# Altium PCB Fastino_Ground_Isolator.PcbDoc (part 1 of 4)
Units mm, origin at the board's own origin, x right, y up, seen from the top; angles counter-clockwise.
Board outline 40 x 100 mm, 4 copper layers (Top Layer, Layer 1, Layer 2, Bottom Layer), stack 1.551 mm thick; 157 components, 67 nets, 468 pads, 321 vias.
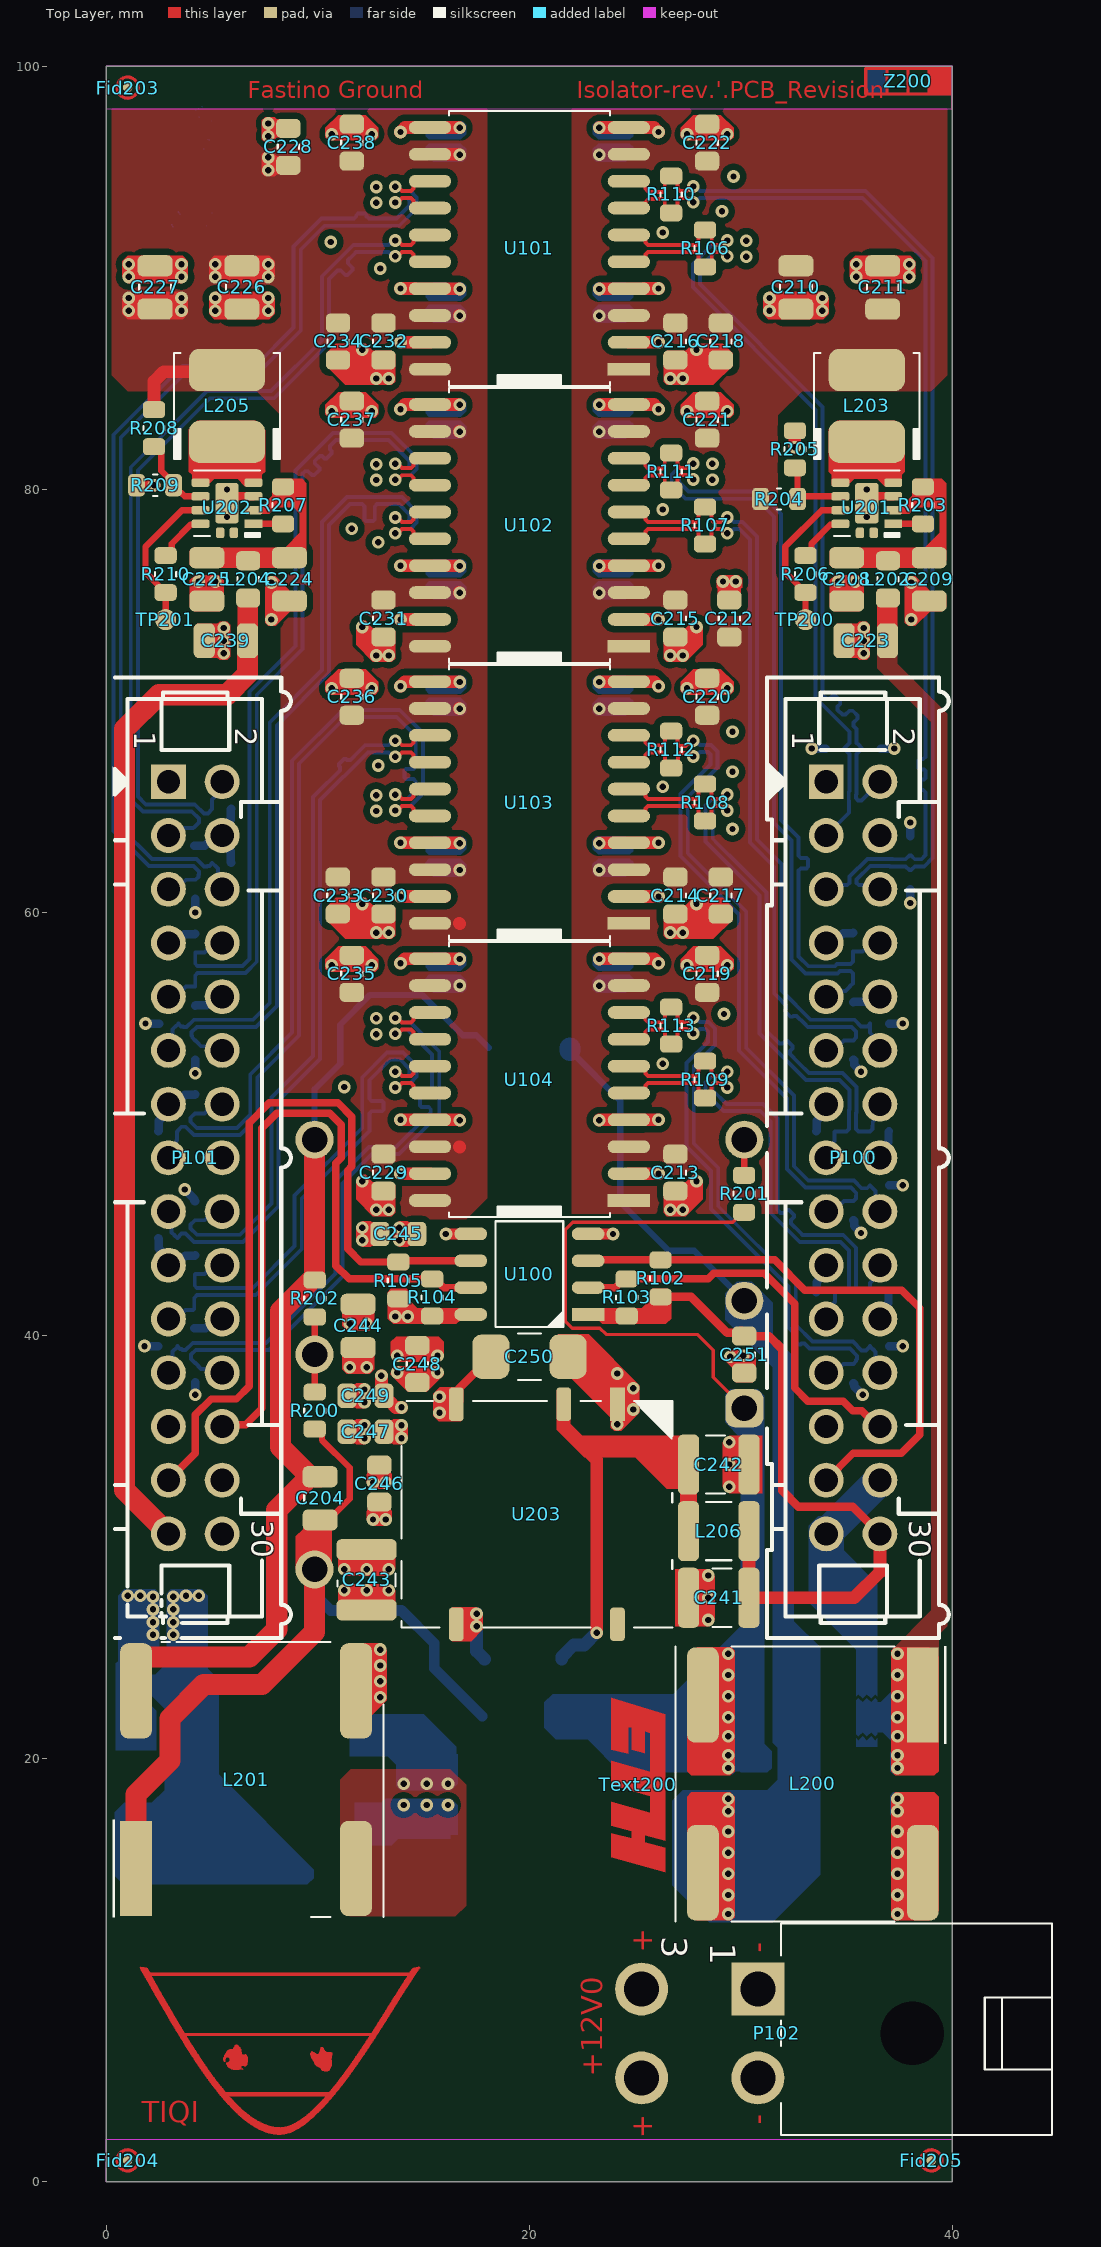
[diagram p0: Top Layer view]
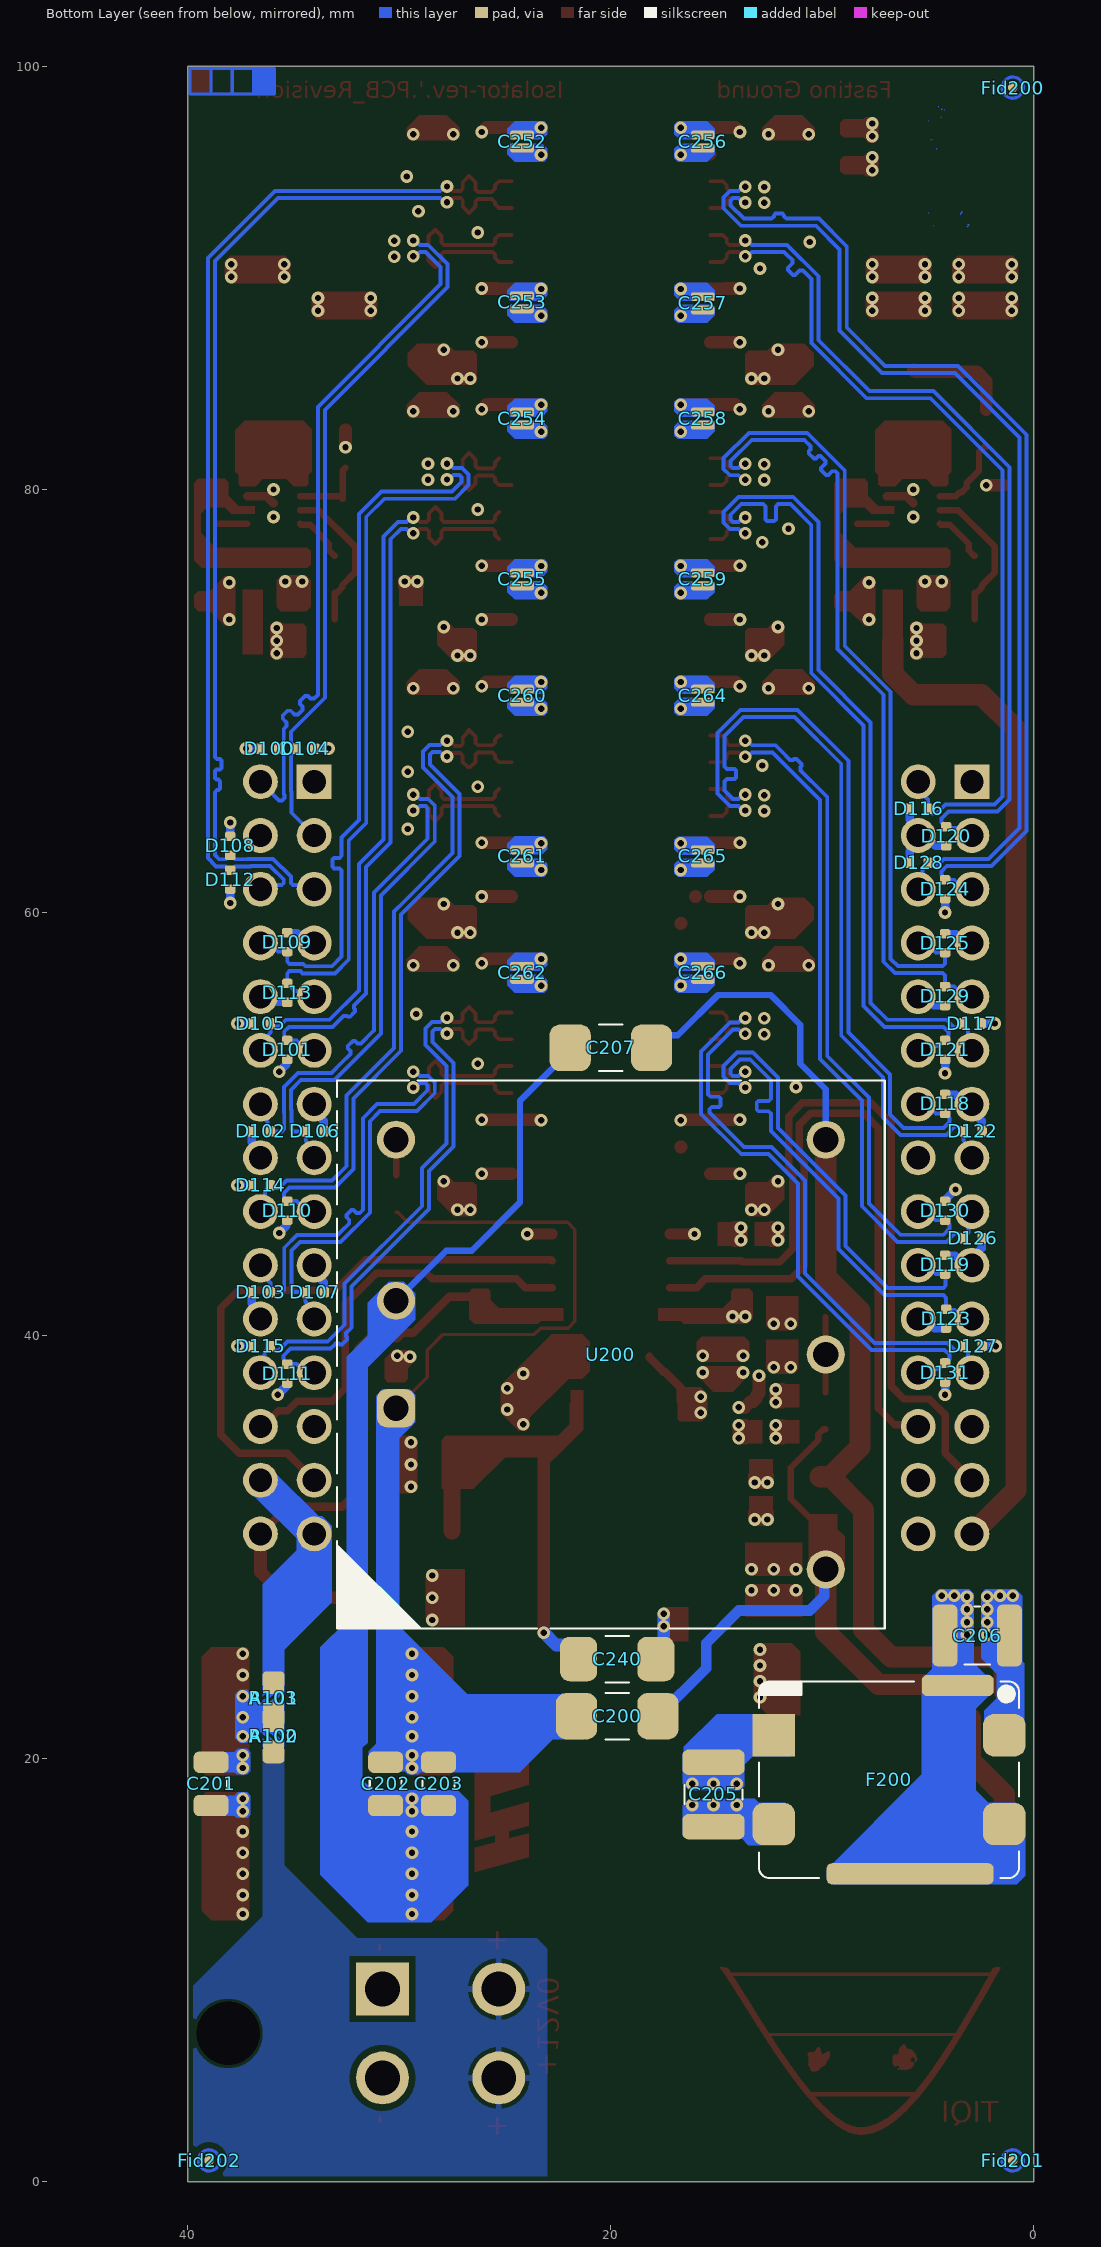
[diagram p1: Bottom Layer view, seen from below]
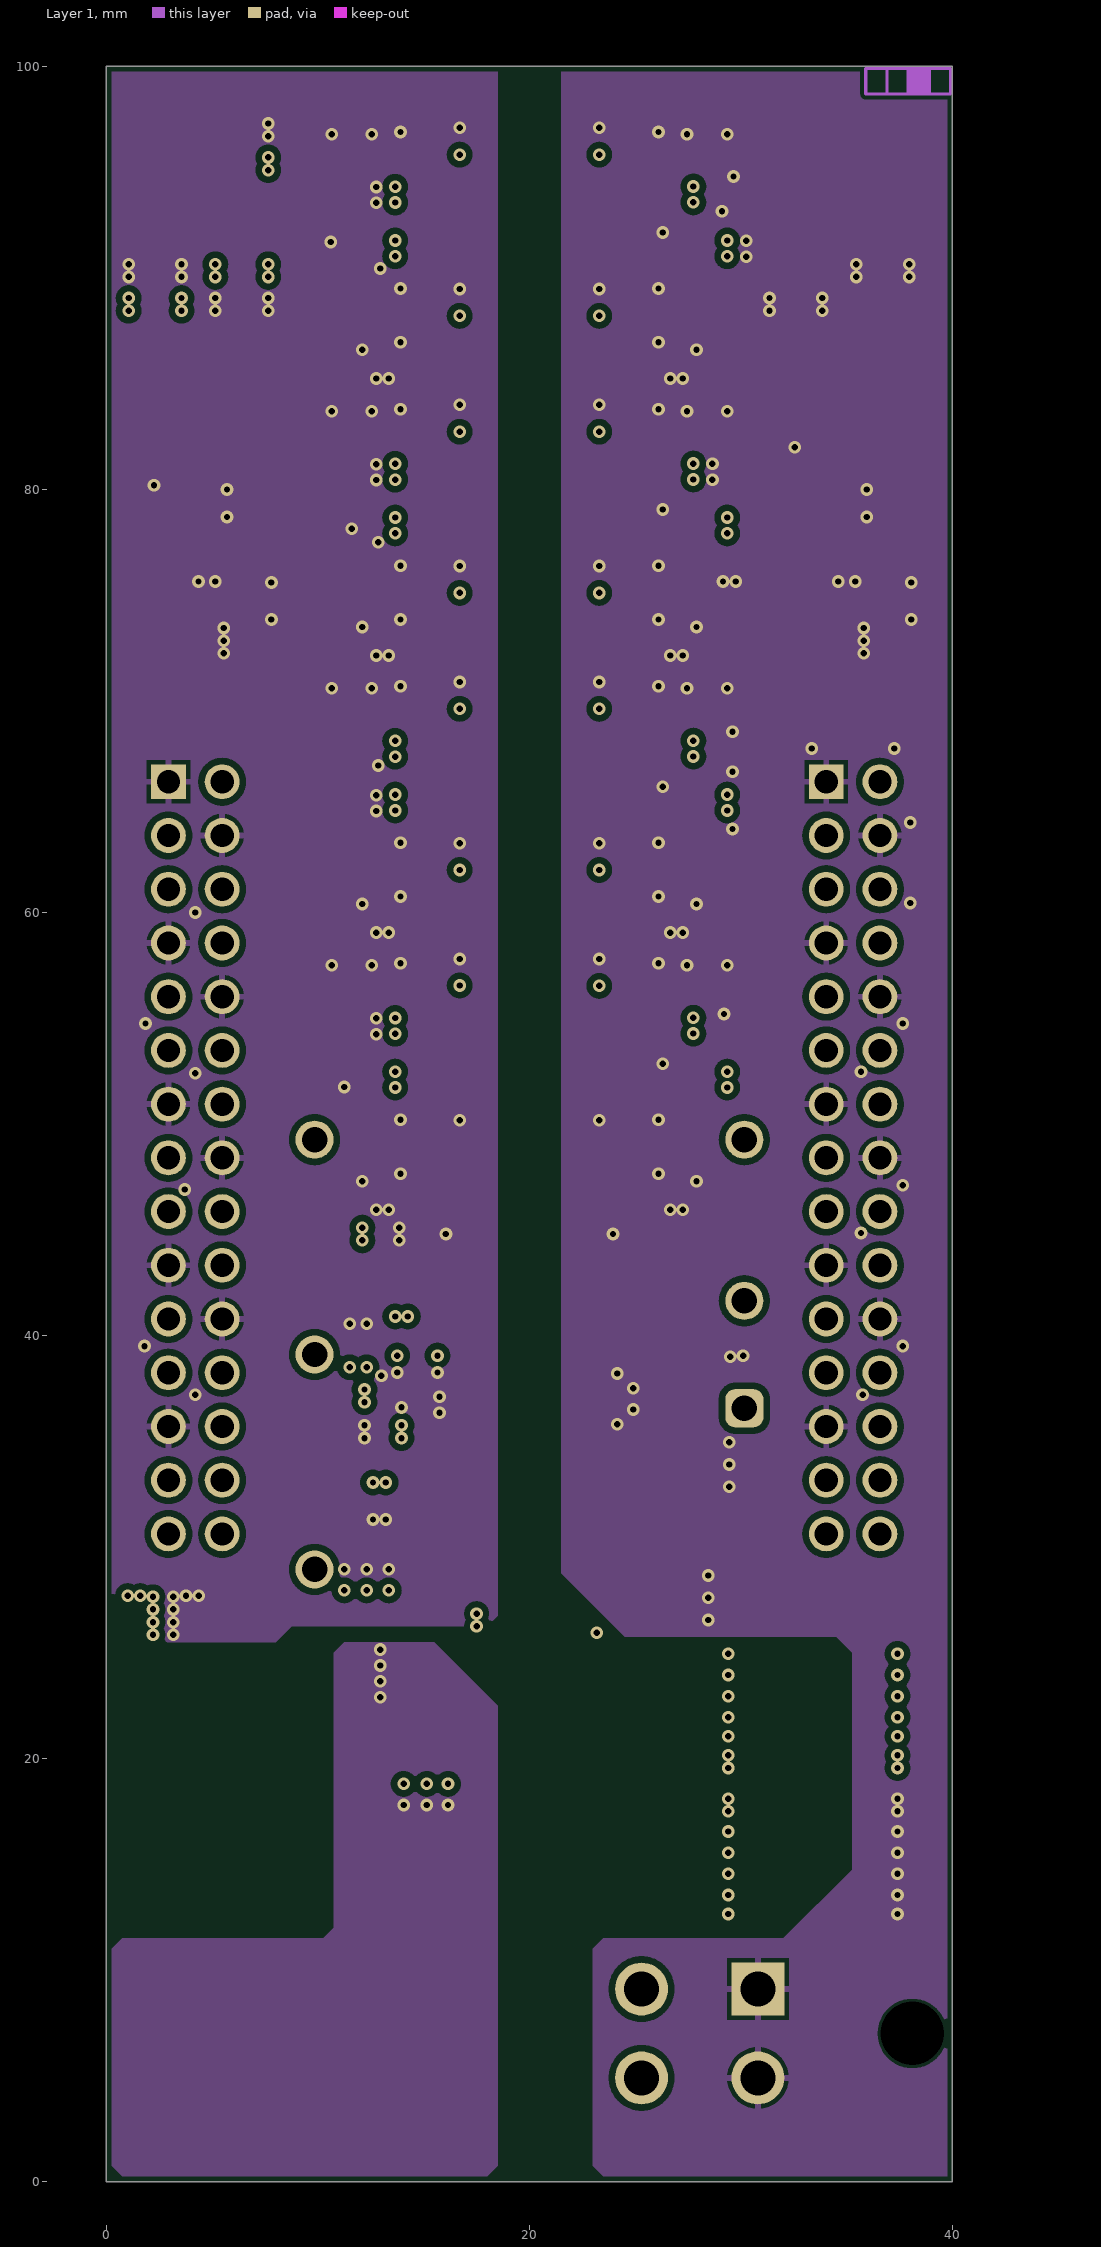
[diagram p2: Layer 1]
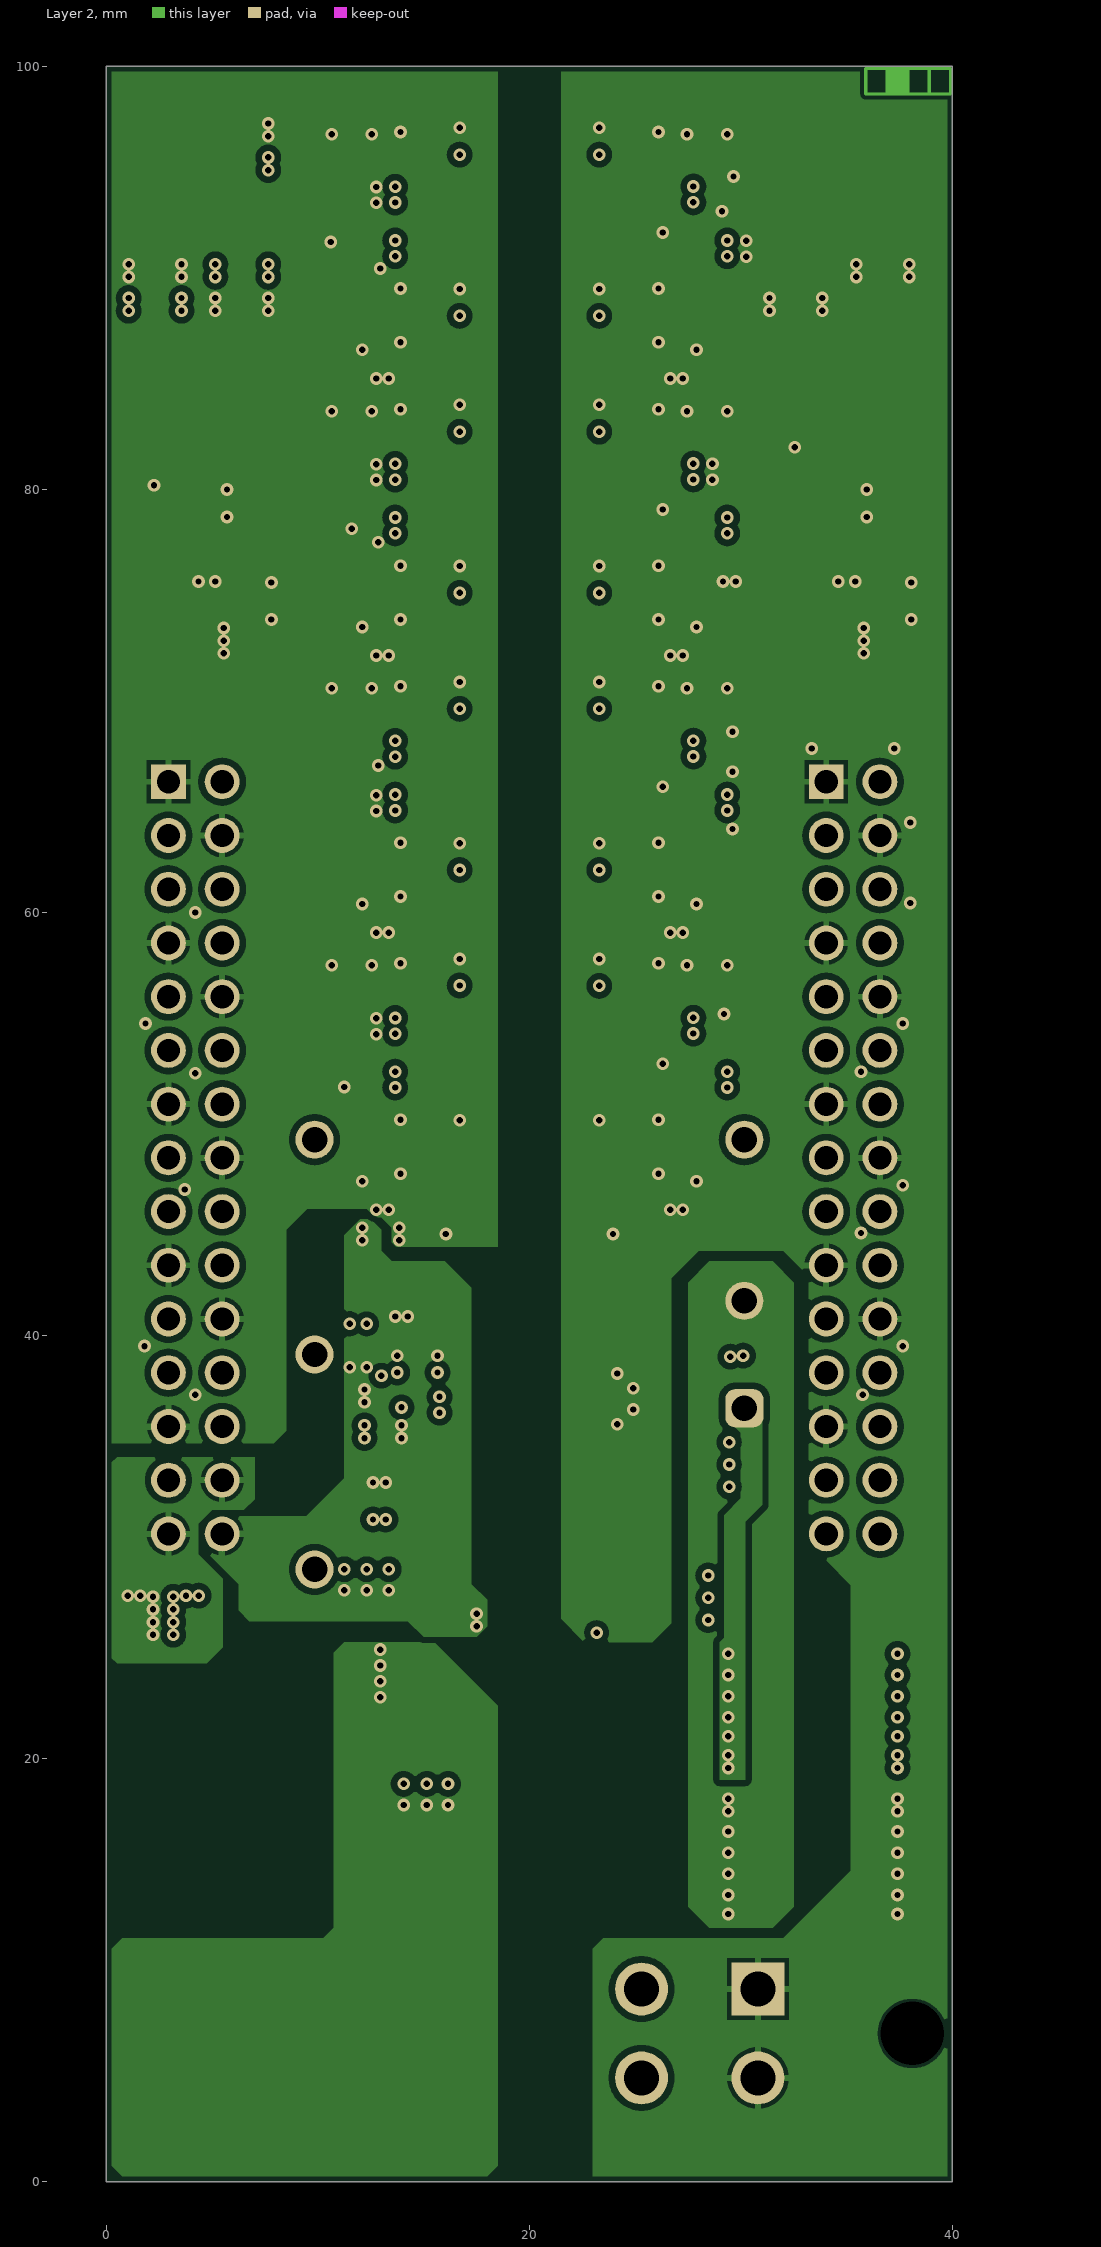
[diagram p3: Layer 2]
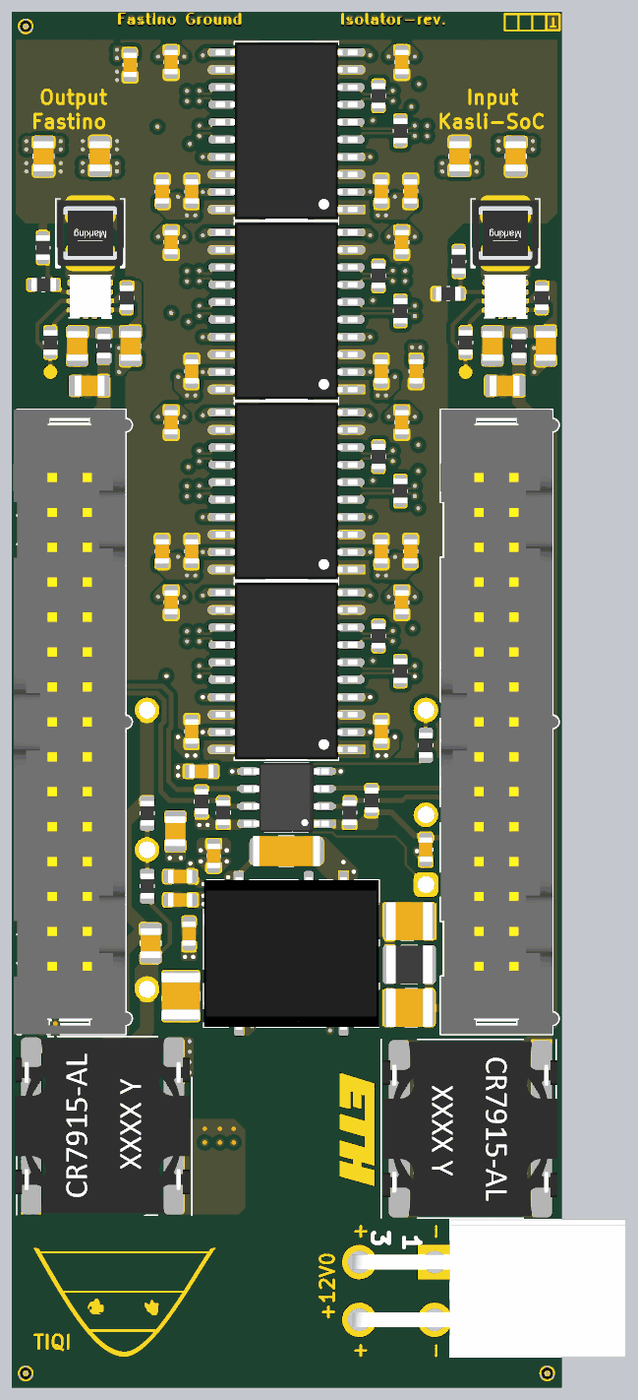
[diagram p6: 3D render of the assembled board from above, using the file's embedded part models]

## Layer stack, top to bottom
Top Solder: solder mask 0.01, Solder Resist, Dk 3.5
Top Layer: signal copper 0.035
Prepreg_1 RO4350B: prepreg 0.168, PP-019, Dk 3.48
Layer 1: signal copper 0.0175
Core_1: core 1.11, Core-043, Dk 4.3
Layer 2: signal copper 0.0175
Prepreg_2 RO4350B: prepreg 0.168, PP-019, Dk 3.48
Bottom Layer: signal copper 0.035
Bottom Solder: solder mask 0.01, Solder Resist, Dk 3.5

## Board outline
0,0 40,0 40,100 0,100

## Design rules (kind name [scope] priority, off if disabled: settings)
BoardOutlineClearance [NOT (OnTopSilkscreen or OnBottomSilkscreen or TouchesRoom('Room_LS'))] p1: gap=0.25 ignorepadtopadclearanceinfootprint=FALSE
Clearance Clearance_LS [WithinRoom('Room_LS')] p1: gap=0.2 ignorepadtopadclearanceinfootprint=FALSE
Clearance [not HasFootprint('Fiducial_PCB') and not HasFootprint('solder_joint')] p2: gap=0.149 ignorepadtopadclearanceinfootprint=FALSE except(0.3: Arc-Poly Track-Poly SMDPad-Poly THPad-Poly Via-Poly Fill-Poly Poly-Poly)
ComponentClearance ComponentClearance_R100-R101 [InComponent('R100') vs InComponent('R101')] p1: gap=-1 collisioncheckmode=3 verticalgap=-1 showdistances=FALSE
ComponentClearance [All] p2: gap=0.15 collisioncheckmode=3 verticalgap=0.254 showdistances=FALSE donotcheckwithout3dbody=TRUE
DiffPairsRouting [All] p1: maxlimit=0.254 minlimit=0.15 mostfreqgap=0.254 toplayer_maxgap=0.15 toplayer_prefgap=0.15 toplayer_minwidth=0.185 toplayer_maxwidth=0.185 toplayer_prefwidth=0.185 bottomlayer_maxgap=0.15 bottomlayer_prefgap=0.15 bottomlayer_minwidth=0.185 bottomlayer_maxwidth=0.185 bottomlayer_prefwidth=0.185 impedanceprofiledriven=TRUE impedanceprofileid={34699C3B-3A6B-4B8C-B63F-D34D3E154140} impedanceprofilevalue=100.000000 maxuncoupledlength=12.7
FabricationTestpoint [All] p1 off: side=3 testpointundercomponent=TRUE minsize=1.016 maxsize=2.54 preferedsize=1.524 minholesize=0 maxholesize=1.016 preferedholesize=0.813 testpointgrid=0.025 allowsidetop=TRUE allowsidebottom=TRUE usegrid=TRUE gridtolerance=0
FanoutControl Fanout_BGA [IsBGA] p1 off: bgadir=Out bgaviamode=Centered fanoutstyle=Auto fanoutdirection=Alternating viagrid=0.025 // Fanout_BGA (Default Rule)
FanoutControl Fanout_LCC [IsLCC] p2 off: bgadir=Out bgaviamode=Centered fanoutstyle=Auto fanoutdirection=Alternating viagrid=0.025 // Fanout_LCC (Default Rule)
FanoutControl Fanout_SOIC [IsSOIC] p3 off: bgadir=Out bgaviamode=Centered fanoutstyle=Auto fanoutdirection=Alternating viagrid=0.025 // Fanout_SOIC (Default Rule)
FanoutControl Fanout_Small [(CompPinCount < 5)] p4 off: bgadir=Out bgaviamode=Centered fanoutstyle=Auto fanoutdirection=OutThenIn viagrid=0.025 // Fanout_Small (Default Rule)
FanoutControl Fanout_Default [All] p5 off: bgadir=Out bgaviamode=Centered fanoutstyle=Auto fanoutdirection=Alternating viagrid=0.025 // Fanout_Default (Default Rule)
Height [All] p1 off: minheight=0 maxheight=25.4 prefheight=12.7
HoleSize [All] p1: absolutevalues=TRUE maxlimit=5 minlimit=0.3 maxpercent=80.000 minpercent=20.000
HoleToHoleClearance [All] p1: gap=0.295 allowstackedmicrovias=TRUE
MatchedLengths [InDifferentialPairClass('All Differential Pairs')] p1: tolerance=0.05 checknetsindiffpair=TRUE checkdiffpairvsdiffpair=FALSE checkxsignals=FALSE checkothers=FALSE
MinimumAnnularRing [All] p1: minimumring=0.149
MinimumSolderMaskSliver [All] p1: minsoldermaskwidth=0.08
PolygonConnect [All] p1: thpad.connectstyle=Relief thpad.reliefconductorwidth=0.3 thpad.reliefentries=4 thpad.polygonreliefangle="90 Angle" thpad.airgapwidth=0.2 smdpad.connectstyle=Relief smdpad.reliefconductorwidth=0.3 smdpad.reliefentries=4 smdpad.polygonreliefangle="90 Angle" smdpad.airgapwidth=0.2 via.connectstyle=Direct via.reliefconductorwidth=0.254 via.reliefentries=4 via.polygonreliefangle="90 Angle" via.airgapwidth=0.254
RoomDefinition Room_LS [False vs False] p1: confinementstyle=ConfineIn formatcopy=TRUE lockcomponents=FALSE outline 35.65,98.45 40.15,98.45 40.15,100.15 35.65,100.15
RoutingVias [All] p1: holewidth=0.3 width=0.6 viastyle="Through Hole" minholewidth=0.3 minwidth=0.6 maxholewidth=0.3 maxwidth=0.6
SilkToSilkClearance [All] p1 off: silktosilkclearance=0.1
SilkToSolderMaskClearance [IsPad] p1: minsilkscreentomaskgap=0.1 clearancetoexposedcopper=TRUE
SolderMaskExpansion SolderMaskExpansion_Via [IsVia] p1: expansion=0.03 istentingtop=FALSE soldermaskfromhole=TRUE
SolderMaskExpansion [All] p2: expansion=0.05 istentingtop=FALSE
SupplyNets "Schematic Supply Nets_11" [InNet('P12V0_ISO')] p1: voltage=0.000
SupplyNets "Schematic Supply Nets_10" [InNet('P12V0_ISO_BF')] p2: voltage=0.000
SupplyNets "Schematic Supply Nets_9" [InNet('P2V5')] p3: voltage=0.000
SupplyNets "Schematic Supply Nets_8" [InNet('P2V5_R')] p4: voltage=0.000
SupplyNets "Schematic Supply Nets_7" [InNet('GND_ISO_BF')] p5: voltage=0.000
SupplyNets "Schematic Supply Nets_6" [InNet('GND_ISO')] p6: voltage=0.000
SupplyNets "Schematic Supply Nets_5" [InNet('P3V3_MP')] p7: voltage=0.000
SupplyNets "Schematic Supply Nets_3" [InNet('P12V0')] p8: voltage=0.000
SupplyNets "Schematic Supply Nets_2" [InNet('GND')] p9: voltage=0.000
SupplyNets "Schematic Supply Nets_1" [InNet('P3V3_MP_R')] p10: voltage=0.000
UnRoutedNet [All] p1: checkbadconnections=TRUE
Width Width_LS [TouchesRoom('Room_LS')] p1: maxlimit=0.254 minlimit=0.145 preferedwidth=0.254
Width Width_LS_1 [InNetClass('50R')] p2: maxlimit=0.35 minlimit=0.145 preferedwidth=0.35 toplayer_minwidth=0.35 bottomlayer_minwidth=0.35 impedanceprofiledriven=TRUE impedanceprofileid={306A9039-A6DE-4912-B42D-1F8D4EA5C115} impedanceprofilevalue=50.000000 minimp=50.000000 maximp=50.000000 favimp=50.000000
Width [All] p3: maxlimit=1.5 minlimit=0.15 preferedwidth=0.3
15 further rules are at their usual default settings.

## Classes and differential pairs
net class PWR: P2V5 P2V5_R P3V3_MP P3V3_MP_R P12V0 P12V0_ISO P12V0_ISO_BF
net class 50R: I2C_SCL I2C_SCL_R I2C_SDA I2C_SDA_R
component class Power: C200 C201 C202 C203 C204 C205 C206 C207 C208 C209 C210 C211 C212 C213 C214 C215 C216 C217 C218 C219 C220 C221 C222 C223 C224 C225 C226 C227 C228 C229 C230 C231 C232 C233 C234 C235 C236 C237 C238 C239 C240 C241 C242 C243 C244 C245 C246 C247 C248 C249 C250 C251 C252 C253 C254 C255 C256 C257 C258 C259 C260 C261 C262 C264 C265 C266 F200 Fid200 Fid201 Fid202 Fid203 Fid204 Fid205 L200 L201 L202 L203 L204 L205 L206 R200 R201 R202 R203 R204 R205 R206 R207 R208 R209 R210 Text200 TP200 TP201 U200 U201 U202 U203 Z200
component class Fastino_Ground_Isolator: A100 A101 A102 A103 D100 D101 D102 D103 D104 D105 D106 D107 D108 D109 D110 D111 D112 D113 D114 D115 D116 D117 D118 D119 D120 D121 D122 D123 D124 D125 D126 D127 D128 D129 D130 D131 P100 P101 P102 R100 R101 R102 R103 R104 R105 R106 R107 R108 R109 R110 R111 R112 R113 U100 U101 U102 U103 U104
differential pair CH_7_R: +CH_7_R_P -CH_7_R_N
differential pair CH_7: +CH_7_P -CH_7_N
differential pair CH_6_R: +CH_6_R_P -CH_6_R_N
differential pair CH_6: +CH_6_P -CH_6_N
differential pair CH_5_R: +CH_5_R_P -CH_5_R_N
differential pair CH_5: +CH_5_P -CH_5_N
differential pair CH_4_R: +CH_4_R_P -CH_4_R_N
differential pair CH_4: +CH_4_P -CH_4_N
differential pair CH_3_R: +CH_3_R_P -CH_3_R_N
differential pair CH_3: +CH_2_P -CH_2_N
differential pair CH_2_R: +CH_2_R_P -CH_2_R_N
differential pair CH_2: +CH_3_P -CH_3_N
differential pair CH_1_R: +CH_1_R_P -CH_1_R_N
differential pair CH_1: +CH_1_P -CH_1_N
differential pair CH_0_R: +CH_0_R_P -CH_0_R_N
differential pair CH_0: +CH_0_P -CH_0_N

## Components (designator, comment, footprint, x,y, rotation, side; value= is the part's Value field where it differs from the comment)
A100 "0451350403" Molex_045135 54.95,62.65 r270 top
A101 "0451350401" Molex_045135 53.2,72.7 r90 top
A102 "" solder_joint 35.95,21.05 r90 bottom
A103 "" solder_joint 35.95,22.85 r270 bottom
C200 "2n20" C_1808_4520x2.20_2-term_N 19.7,22 r180 bottom
C201 "10u" C_0805_2012x1.45_2-term_N 38.9,18.8 r270 bottom
C202 "10u" C_0805_2012x1.45_2-term_N 30.65,18.8 r270 bottom
C203 "10u" C_0805_2012x1.45_2-term_N 28.15,18.8 r270 bottom
C204 "10u" C_0805_2012x1.45_2-term_N 10.1,32.3 r90 top
C205 "47u" C_1210_3225x2.80_2-term_N 15.15,18.3 r270 bottom
C206 "47u" C_1210_3225x2.80_2-term_N 2.68,25.815 r0 bottom
C207 "2n20" C_1808_4520x2.20_2-term_N 20,53.6 r180 bottom
C208 "10u" C_0805_2012x1.45_2-term_N 35,75.75 r270 top
C209 "10u" C_0805_2012x1.45_2-term_N 38.9,75.75 r270 top
C210 "10u" C_0805_2012x1.45_2-term_N 32.6,89.55 r270 top
C211 "10u" C_0805_2012x1.45_2-term_N 36.7,89.55 r90 top
C212 "4u70" C_0603_1608x0.90_2-term_N 29.45,73.9 r90 top
C213 "1u" C_0603_1608x0.90_2-term_N 26.9,47.7 r270 top
C214 "1u" C_0603_1608x0.90_2-term_N 26.9,60.8 r270 top
C215 "1u" C_0603_1608x0.90_2-term_N 26.9,73.9 r270 top
C216 "1u" C_0603_1608x0.90_2-term_N 26.9,87 r270 top
C217 "470n" C_0603_1608x0.90_2-term_N 29.05,60.8 r270 top
C218 "470n" C_0603_1608x0.90_2-term_N 29.05,87 r270 top
C219 "100n" C_0603_1608x0.90_2-term_N 28.4,57.1 r90 top
C220 "100n" C_0603_1608x0.90_2-term_N 28.4,70.2 r90 top
C221 "100n" C_0603_1608x0.90_2-term_N 28.4,83.3 r90 top
C222 "100n" C_0603_1608x0.90_2-term_N 28.4,96.4 r90 top
C223 "10u" C_0805_2012x1.45_2-term_N 35.9,72.85 r180 top
C224 "10u" C_0805_2012x1.45_2-term_N 8.65,75.75 r270 top
C225 "10u" C_0805_2012x1.45_2-term_N 4.75,75.75 r270 top
C226 "10u" C_0805_2012x1.45_2-term_N 6.4,89.55 r270 top
C227 "10u" C_0805_2012x1.45_2-term_N 2.3,89.55 r90 top
C228 "4u70" C_0603_1608x0.90_2-term_N 8.6,96.2 r90 top
C229 "1u" C_0603_1608x0.90_2-term_N 13.1,47.7 r270 top
C230 "1u" C_0603_1608x0.90_2-term_N 13.1,60.8 r270 top
C231 "1u" C_0603_1608x0.90_2-term_N 13.1,73.9 r270 top
C232 "1u" C_0603_1608x0.90_2-term_N 13.1,87 r270 top
C233 "470n" C_0603_1608x0.90_2-term_N 10.941,60.8 r270 top
C234 "470n" C_0603_1608x0.90_2-term_N 10.95,87 r270 top
C235 "100n" C_0603_1608x0.90_2-term_N 11.6,57.1 r90 top
C236 "100n" C_0603_1608x0.90_2-term_N 11.6,70.2 r90 top
C237 "100n" C_0603_1608x0.90_2-term_N 11.6,83.3 r90 top
C238 "100n" C_0603_1608x0.90_2-term_N 11.6,96.4 r90 top
C239 "10u" C_0805_2012x1.45_2-term_N 5.65,72.85 r180 top
C240 "1n" C_1808_4520x1.50_2-term_L 19.7,24.7 r180 bottom
C241 "47u" C_1210_3225x2.80_2-term_L 28.95,27.6 r180 top
C242 "47u" C_1210_3225x2.80_2-term_L 28.95,33.9 r0 top
C243 "47u" C_1210_3225x2.80_2-term_L 12.3,28.45 r90 top
C244 "10u" C_0805_2012x1.45_2-term_N 11.9,40.45 r90 top
C245 "4u70" C_0603_1608x0.90_2-term_N 13.8,44.8 r0 top
C246 "1u" C_0603_1608x0.90_2-term_N 12.9,33 r270 top
C247 "470n" C_0603_1608x0.90_2-term_N 12.25,35.45 r180 top
C248 "100n" C_0603_1608x0.90_2-term_N 14.7,38.65 r270 top
C249 "100n" C_0603_1608x0.90_2-term_N 12.25,37.15 r0 top
C250 "1n" C_1808_4520x1.50_2-term_L 20,39 r180 top
C251 "100n" C_0603_1608x0.90_2-term_N 30.15,39.1 r270 top
C252 "47n" C_0204_0510x0.35_2-term_N 24.2,96.45 r90 bottom
C253 "47n" C_0204_0510x0.35_2-term_N 24.2,88.85 r90 bottom
C254 "47n" C_0204_0510x0.35_2-term_N 24.2,83.35 r90 bottom
C255 "47n" C_0204_0510x0.35_2-term_N 24.2,75.75 r90 bottom
C256 "47n" C_0204_0510x0.35_2-term_N 15.65,96.45 r90 bottom
C257 "47n" C_0204_0510x0.35_2-term_N 15.65,88.8 r90 bottom
C258 "47n" C_0204_0510x0.35_2-term_N 15.65,83.35 r90 bottom
C259 "47n" C_0204_0510x0.35_2-term_N 15.65,75.75 r90 bottom
C260 "47n" C_0204_0510x0.35_2-term_N 24.2,70.25 r90 bottom
C261 "47n" C_0204_0510x0.35_2-term_N 24.2,62.65 r90 bottom
C262 "47n" C_0204_0510x0.35_2-term_N 24.2,57.15 r90 bottom
C264 "47n" C_0204_0510x0.35_2-term_N 15.65,70.25 r90 bottom
C265 "47n" C_0204_0510x0.35_2-term_N 15.65,62.65 r90 bottom
C266 "47n" C_0204_0510x0.35_2-term_N 15.65,57.15 r90 bottom
D100 "TPD1E0B04DPYT" TI_DPY0002A_X1SON 36.15,67.75 r270 bottom
D101 "TPD1E0B04DPYT" TI_DPY0002A_X1SON 35.3,53.5 r180 bottom
D102 "TPD1E0B04DPYT" TI_DPY0002A_X1SON 36.55,49.65 r270 bottom
D103 "TPD1E0B04DPYT" TI_DPY0002A_X1SON 36.55,42.05 r270 bottom
D104 "TPD1E0B04DPYT" TI_DPY0002A_X1SON 34.45,67.75 r90 bottom
D105 "TPD1E0B04DPYT" TI_DPY0002A_X1SON 36.55,54.75 r270 bottom
D106 "TPD1E0B04DPYT" TI_DPY0002A_X1SON 34,49.65 r90 bottom
D107 "TPD1E0B04DPYT" TI_DPY0002A_X1SON 34,42.05 r90 bottom
D108 "TPD1E0B04DPYT" TI_DPY0002A_X1SON 38,63.15 r0 bottom
D109 "TPD1E0B04DPYT" TI_DPY0002A_X1SON 35.3,58.6 r0 bottom
D110 "TPD1E0B04DPYT" TI_DPY0002A_X1SON 35.3,45.9 r180 bottom
D111 "TPD1E0B04DPYT" TI_DPY0002A_X1SON 35.3,38.2 r180 bottom
D112 "TPD1E0B04DPYT" TI_DPY0002A_X1SON 38,61.55 r180 bottom
D113 "TPD1E0B04DPYT" TI_DPY0002A_X1SON 35.3,56.2 r180 bottom
D114 "TPD1E0B04DPYT" TI_DPY0002A_X1SON 36.55,47.1 r270 bottom
D115 "TPD1E0B04DPYT" TI_DPY0002A_X1SON 36.55,39.5 r270 bottom
D116 "TPD1E0B04DPYT" TI_DPY0002A_X1SON 5.45,64.9 r270 bottom
D117 "TPD1E0B04DPYT" TI_DPY0002A_X1SON 2.95,54.75 r90 bottom
D118 "TPD1E0B04DPYT" TI_DPY0002A_X1SON 4.2,50.95 r0 bottom
D119 "TPD1E0B04DPYT" TI_DPY0002A_X1SON 4.2,43.35 r0 bottom
D120 "TPD1E0B04DPYT" TI_DPY0002A_X1SON 4.15,63.6 r180 bottom
D121 "TPD1E0B04DPYT" TI_DPY0002A_X1SON 4.2,53.5 r180 bottom
D122 "TPD1E0B04DPYT" TI_DPY0002A_X1SON 2.9,49.65 r90 bottom
D123 "TPD1E0B04DPYT" TI_DPY0002A_X1SON 4.15,40.8 r180 bottom
D124 "TPD1E0B04DPYT" TI_DPY0002A_X1SON 4.2,61.1 r180 bottom
D125 "TPD1E0B04DPYT" TI_DPY0002A_X1SON 4.2,58.55 r0 bottom
D126 "TPD1E0B04DPYT" TI_DPY0002A_X1SON 2.9,44.6 r90 bottom
D127 "TPD1E0B04DPYT" TI_DPY0002A_X1SON 2.9,39.5 r90 bottom
D128 "TPD1E0B04DPYT" TI_DPY0002A_X1SON 5.45,62.35 r270 bottom
D129 "TPD1E0B04DPYT" TI_DPY0002A_X1SON 4.2,56.05 r180 bottom
D130 "TPD1E0B04DPYT" TI_DPY0002A_X1SON 4.2,45.9 r0 bottom
D131 "TPD1E0B04DPYT" TI_DPY0002A_X1SON 4.2,38.25 r180 bottom
F200 "BNX026H01L" Murata_BNX026H01L 6.85,19 r180 bottom
Fid200 "PCB Fiducial" Fiducial_PCB 1,99 r180 bottom
Fid201 "PCB Fiducial" Fiducial_PCB 1,1 r180 bottom
Fid202 "PCB Fiducial" Fiducial_PCB 39,1 r180 bottom
Fid203 "PCB Fiducial" Fiducial_PCB 1,99 r0 top
Fid204 "PCB Fiducial" Fiducial_PCB 1,1 r0 top
Fid205 "PCB Fiducial" Fiducial_PCB 39,1 r0 top
L200 "1m12 - 2.6A" Coilcraft_CR7915-ALD 33.4,18.8 r270 top
L201 "1m12 - 2.6A" Coilcraft_CR7915-ALD 6.6,19 r90 top
L202 "3u30 - 1.05A" L_0603_1608x0.95_2-term_N 36.95,75.75 r90 top
L203 "22u - 1A" WE-LQFS-4818 35.95,83.95 r90 top
L204 "3u30 - 1.05A" L_0603_1608x0.95_2-term_N 6.7,75.75 r90 top
L205 "22u - 1A" WE-LQFS-4818 5.7,83.95 r90 top
L206 "47u - 670mA" L_1210_3225x1.50_2-term_L 28.95,30.75 r180 top
P100 "N2530-6002RB" 3M_N2530-6002RB 35.3,48.4 r270 top
P101 "N2530-6002RB" 3M_N2530-6002RB 4.2,48.4 r270 top
P102 "0039300040" Molex_0039300040 28.05,7 r270 top
R100 "0R" R_0603_1608x0.55_2-term_N 35.95,21.05 r90 bottom
R101 "0R" R_0603_1608x0.55_2-term_N 35.95,22.85 r270 bottom
R102 "4k75" R_0603_1608x0.45_2-term_N 26.2,42.7 r270 top
R103 "4k75" R_0603_1608x0.45_2-term_N 24.6,41.8 r270 top
R104 "4k75" R_0603_1608x0.45_2-term_N 15.4,41.8 r270 top
R105 "4k75" R_0603_1608x0.45_2-term_N 13.8,42.6 r270 top
R106 "100R" R_0603_1608x0.55_2-term_N 28.3,91.4 r270 top
R107 "100R" R_0603_1608x0.55_2-term_N 28.3,78.3 r270 top
R108 "100R" R_0603_1608x0.55_2-term_N 28.3,65.2 r270 top
R109 "100R" R_0603_1608x0.55_2-term_N 28.3,52.1 r270 top
R110 "100R" R_0603_1608x0.55_2-term_N 26.7,93.95 r270 top
R111 "100R" R_0603_1608x0.55_2-term_N 26.7,80.85 r270 top
R112 "100R" R_0603_1608x0.55_2-term_N 26.7,67.7 r270 top
R113 "100R" R_0603_1608x0.55_2-term_N 26.7,54.65 r270 top
R200 "TBD" R_0603_1608x1.25_2-term_N 9.85,36.45 r90 top
R201 "TBD" R_0603_1608x1.25_2-term_N 30.15,46.7 r90 top
R202 "TBD" R_0603_1608x1.25_2-term_N 9.85,41.75 r270 top
R203 "51k" R_0603_1608x0.55_2-term_N 38.6,79.25 r270 top
R204 "15k" R_0603_1608x0.45_2-term_N 31.8,79.55 r0 top
R205 "4k75" R_0603_1608x0.45_2-term_N 32.55,81.9 r90 top
R206 "51k" R_0603_1608x0.55_2-term_N 33.05,76 r270 top
R207 "51k" R_0603_1608x0.55_2-term_N 8.35,79.25 r270 top
R208 "15k" R_0603_1608x0.45_2-term_N 2.25,82.9 r270 top
R209 "4k75" R_0603_1608x0.45_2-term_N 2.3,80.2 r180 top
R210 "51k" R_0603_1608x0.55_2-term_N 2.8,76 r270 top
Text200 "ETH" Logo_ETH_8.6x2.8mm 25.15,18.75 r270 top
TP200 "Test Point" TP_SMD_circle_1mm_ 33.05,73.85 r0 top
TP201 "Test Point" TP_SMD_circle_1mm_ 2.8,73.85 r90 top
U100 "ADUM1255ASA+" SOIC127P620X175-8N 20,42.9 r180 top
U101 "ADN4654BRWZ" SOIC-20_W 20,91.4 r180 top
U102 "ADN4654BRWZ" SOIC-20_W 20,78.3 r180 top
U103 "ADN4654BRWZ" SOIC-20_W 20,65.2 r180 top
U104 "ADN4654BRWZ" SOIC-20_W 20,52.1 r180 top
U200 "BCT40T24S12" XP-Power_BCT40T24S12 20,39.1 r180 bottom
U201 "RPL-1.0-R" RECOM_RPL-1.0-R 35.95,79.35 r180 top
U202 "RPL-1.0-R" RECOM_RPL-1.0-R 5.7,79.35 r180 top
U203 "PBT01F03S3V3" XP-Power_PBT01F 20.35,31.55 r180 top
Z200 "Stackup - 4L" Stackup_4L 37.9,99.3 r180 top

## Footprints (in the part's own frame and the unit in brackets; to place one, negate y for a bottom-side part, rotate by r counter-clockwise, add the part's x,y. Pads: shape width x height; smd on the part's side, far side on the other; paste and mask are expansions set on the pad)
3M_N2530-6002RB [mm]
  rect 1.65x1.65 hole 1.1: 1(-17.78,-1.27)
  round 1.65 hole 1.1: 2(-17.78,1.27) 3(-15.24,-1.27) 4(-15.24,1.27) 5(-12.7,-1.27) 6(-12.7,1.27) 7(-10.16,-1.27) 8(-10.16,1.27) 9(-7.62,-1.27) 10(-7.62,1.27) 11(-5.08,-1.27) 12(-5.08,1.27) 13(-2.54,-1.27) 14(-2.54,1.27) 15(0,-1.27) 16(0,1.27) 17(2.54,-1.27) 18(2.54,1.27) 19(5.08,-1.27) 20(5.08,1.27) 21(7.62,-1.27) 22(7.62,1.27) 23(10.16,-1.27) 24(10.16,1.27) 25(12.7,-1.27) 26(12.7,1.27) 27(15.24,-1.27) 28(15.24,1.27) 29(17.78,-1.27) 30(17.78,1.27)
  silkscreen extent -22.71,-4.1 22.71,4.52, body extent -22.71,-4.11 22.71,4.52, height 9.92
C_0204_0510x0.35_2-term_N [mm]
  rrect50% 0.42x1.12 smd paste-0.5: 1(-0.31,0) 2(0.31,0)
  body extent -0.29,-0.53 0.29,0.53, height 0.35
C_0603_1608x0.90_2-term_N [mm] "Name_YYMMDD - X:1.80 - Y:1.00 - Z:0.90mm, IPC Nominal Density"
  rrect50% 0.9x1.15 smd paste-0.1: 1(-0.875,0) 2(0.875,0)
  silkscreen extent -0.1,-0.5 0.1,0.5, body extent -0.9,-0.5 0.9,0.5, height 0.9
C_0805_2012x1.45_2-term_N [mm] "Name_YYMMDD - X:2.20 - Y:1.50 - Z:1.45mm, IPC Nominal Density"
  rrect50% 1x1.65 smd paste-0.05: 1(-1.025,0) 2(1.025,0)
  silkscreen extent -0.15,0.75 0.15,0.75, body extent -1.1,-0.75 1.1,0.75, height 1.45
C_1210_3225x2.80_2-term_L [mm] "Name_YYMMDD - X:3.40 - Y:2.80 - Z:2.80mm, IPC High Density"
  rrect50% 1x2.85 smd paste-0.1: 1(-1.425,0) 2(1.425,0)
  silkscreen extent -0.6,-1.37 0.3,1.38, body extent -1.7,-1.4 1.7,1.4, height 2.8
C_1210_3225x2.80_2-term_N [mm] "Name_YYMMDD - X:3.40 - Y:2.80 - Z:2.80mm, IPC Nominal Density"
  rrect50% 1.2x2.95 smd paste-0.1: 1(-1.525,0) 2(1.525,0)
  silkscreen extent -0.44,-1.38 0.44,1.38, body extent -1.7,-1.4 1.7,1.4, height 2.8
C_1808_4520x1.50_2-term_L [mm]
  rrect50% 1.75x2.1 smd: 1(-1.825,0) 2(1.825,0)
  silkscreen extent -0.55,-1.1 0.55,1.1, body extent -2.45,-1.1 2.45,1.1, height 1.5
C_1808_4520x2.20_2-term_N [mm] "PCLE_180708 - X:4.60 - Y:2.00 - Z:2.20mm, IPC Medium Density"
  rrect50% 1.95x2.2 smd: 1(-1.925,0) 2(1.925,0)
  silkscreen extent -0.55,-1.1 0.55,1.1, body extent -2.55,-1.1 2.55,1.1, height 2.2
Coilcraft_CR7915-ALD [mm]
  rect 4.5x1.5 smd paste-2539.97: 1(-4.2,5.2)
  rrect50% 4.5x1.5 smd: 2(-4.2,-5.2) 3(4.2,-5.2) 4(4.2,5.2)
  silkscreen extent -6.5,-6.5 6.5,6.3, body extent -6.35,-6.35 6.35,6.35, height 5.47
Fiducial_PCB [mm] "PCLE_2022-08-10 - PCB Fiducial"
  round 0.45 smd paste-0.5 mask+0.36: 1(0,0)
  Top Layer circle w0.15: c0,0 r0.5
  body extent -0.57,-0.57 0.57,0.57, height 0.01
L_0603_1608x0.95_2-term_N [mm] "Name_YYMMDD - X:1.80 - Y:1.00 - Z:0.95mm, IPC Nominal Density"
  rrect50% 0.9x1.14 smd: 1(-0.88,0) 2(0.88,0)
  silkscreen extent -0.1,-0.5 0.1,0.5, body extent -0.9,-0.5 0.9,0.5, height 0.95
L_1210_3225x1.50_2-term_L [mm] "Name_YYMMDD - X:3.40 - Y:2.80 - Z:1.50mm, IPC High Density"
  rrect50% 1x2.84 smd: 1(-1.43,0) 2(1.43,0)
  silkscreen extent -0.6,-1.37 0.6,1.38, body extent -1.7,-1.4 1.7,1.4, height 1.5
Logo_ETH_8.6x2.8mm [mm] "PCLE_180503 - Logo \"ETH\""
  Top Layer pour cut-out: -3.44,1.4 -4.3,-1.4 3.52,-1.4 4.3,1.4
  Top Layer region: -3.34,1.276 -4.127,-1.276 -1.664,-1.276 -1.486,-0.476 -2.718,-0.476 -2.718,-0.306 -1.667,-0.306 -1.488,0.304 -2.528,0.304 -2.451,0.552 -0.622,0.552 -1.143,-1.276 0,-1.276 0.533,0.552 1.308,0.552 0.787,-1.276 1.93,-1.276 2.197,-0.311 2.527,-0.311 2.273,-1.276 3.416,-1.276 4.127,1.276 2.959,1.276 2.718,0.311 2.375,0.311 2.642,1.276
  body extent -4.13,-1.28 4.13,1.28, height 0.01
Molex_045135 [mm]
  body extent -4.8,-8.9 4.8,10.7, height 14.41
Molex_0039300040 [mm]
  rect 2.5x2.5 hole 1.65: 1(-2.1,2.75)
  round 2.5 hole 1.65: 2(2.1,2.75) 3(-2.1,-2.75) 4(2.1,-2.75)
  round 1 hole 3 unplated mask+1: 5(0,10.05)
  silkscreen extent -5.2,3.85 4.8,16.65, body extent -5.2,-3.28 4.8,16.65, height 11.4
Murata_BNX026H01L [mm]
  rect 2x2 smd paste-2539.97: 1(-5.45,2.1)
  rrect50% 2x2 smd paste-2539.97: 2(5.45,2.1) 3(-5.45,-2.1) 4(5.45,-2.1)
  rrect50% 7.9x1 smd paste-2539.97: 4(1,-4.45)
  rrect50% 3.4x1 smd paste-2539.97: 4(3.25,4.45)
  silkscreen extent -6.15,-4.65 6.15,4.66, body extent -6.05,-4.55 6.05,4.55, height 3.11
R_0603_1608x0.45_2-term_N [mm] "Name_YYMMDD - X:1.80 - Y:1.00 - Z:0.45mm, IPC Nominal Density"
  rrect50% 0.8x1.05 smd paste-0.1: 1(-0.875,0) 2(0.875,0)
  silkscreen extent -0.1,-0.5 0.1,0.5, body extent -0.9,-0.5 0.9,0.5, height 0.45
R_0603_1608x0.55_2-term_N [mm] "Name_YYMMDD - X:1.80 - Y:1.00 - Z:0.55mm, IPC Nominal Density"
  rrect50% 0.8x1.05 smd paste-0.1: 1(-0.875,0) 2(0.875,0)
  body extent -0.9,-0.5 0.9,0.5, height 0.55
R_0603_1608x1.25_2-term_N [mm] "Name_YYMMDD - X:1.80 - Y:1.00 - Z:1.25mm, IPC Nominal Density"
  rrect50% 0.8x1.05 smd: 1(-0.875,0) 2(0.875,0)
  silkscreen extent -0.1,-0.5 0.1,0.5, body extent -0.9,-0.5 0.9,0.5, height 1.25
RECOM_RPL-1.0-R [mm]
  rect 0.85x0.4 smd paste-2539.97: 1(-1.25,0.975)
  rrect50% 0.85x0.4 smd paste-2539.97: 2(-1.25,0.325) 3(-1.25,-0.325) 4(-1.25,-0.975) 5(1.25,-0.975) 6(1.25,-0.325) 7(1.25,0.325) 8(1.25,0.975)
  rrect50% 0.4x0.5 smd paste-2539.97: 9(0.325,1.4) 10(-0.325,1.4)
  rrect20% 1.1x1.9 smd paste-2539.97: 11(0,0)
  silkscreen extent -1.55,-1.55 1.55,1.6, body extent -1.5,-1.5 1.5,1.5, height 2.01
SOIC127P620X175-8N [mm] "SOIC, 8-Leads, Body 5.00x4.00mm, Pitch 1.27mm, IPC Medium Density"
  rect 1.55x0.6 smd paste-2539.97: 1(-2.775,1.905)
  oval 1.55x0.6 smd: 2(-2.775,0.635) 3(-2.775,-0.635) 4(-2.775,-1.905) 5(2.775,-1.905) 6(2.775,-0.635) 7(2.775,0.635) 8(2.775,1.905)
  silkscreen extent -1.6,-2.5 1.6,2.5, body extent -3.1,-2.5 3.1,2.5, height 1.75
SOIC-20_W [mm]
  rect 2x0.6 smd paste-2539.97: 1(-4.7,5.715)
  oval 2x0.6 smd: 2(-4.7,4.445) 3(-4.7,3.175) 4(-4.7,1.905) 5(-4.7,0.635) 6(-4.7,-0.635) 7(-4.7,-1.905) 8(-4.7,-3.175) 9(-4.7,-4.445) 10(-4.7,-5.715) 11(4.7,-5.715) 12(4.7,-4.445) 13(4.7,-3.175) 14(4.7,-1.905) 15(4.7,-0.635) 16(4.7,0.635) 17(4.7,1.905) 18(4.7,3.175) 19(4.7,4.445) 20(4.7,5.715)
  silkscreen extent -3.8,-6.5 3.8,6.5, body extent -5.16,-6.4 5.16,6.4, height 2.65
solder_joint [mm]
  rrect50% 0.4x1 smd paste-1: 1(-0.4,0) 2(0.4,0)
  Top Layer region: 0.5,0.5 0.5,-0.5 0.1,-0.5 0,-0.4 0.2,-0.2 0,0 0.2,0.2 0,0.4 0.1,0.5
  Top Layer region: -0.5,0.5 -0.5,-0.5 -0.1,-0.5 -0.2,-0.4 0,-0.2 -0.2,0 0,0.2 -0.2,0.4 -0.1,0.5
Stackup_4L [mm]
  Top Layer region: -2,-0.6 -1,-0.6 -1,0.6 -2,0.6
  Top Layer lines w0.15: 1,0.6 2,0.6 2,-0.6 1,-0.6 ; 1,0.6 1,-0.6 ; 1,0.6 0,0.6 ; 1,-0.6 0,-0.6 ; 0,0.6 0,-0.6 ; 0,0.6 -1,0.6 ; 0,-0.6 -1,-0.6 ; -1,0.6 -1,-0.6 ; -1,0.6 -2,0.6 -2,-0.6 -1,-0.6
  Bottom Layer region: 1,-0.6 2,-0.6 2,0.6 1,0.6
  Bottom Layer lines w0.15: 1,0.6 1,-0.6 ; 0,0.6 2,0.6 2,-0.6 0,-0.6 ; 0,0.6 0,-0.6 ; 0,0.6 -1,0.6 ; 0,-0.6 -1,-0.6 ; -1,0.6 -1,-0.6 ; -1,0.6 -2,0.6 -2,-0.6 -1,-0.6
  body extent -2.08,-0.68 2.08,0.67, height 0.01
TI_DPY0002A_X1SON [mm]
  rrect50% 0.5x0.45 smd paste-0.05: 1(0,0.45) 2(0,-0.45)
  body extent -0.35,-0.55 0.35,0.55, height 0.45
TP_SMD_circle_1mm_ [mm]
  round 1 smd paste-1: 1(0,0)
  body extent -0.5,-0.5 0.5,0.5, height 0.01
WE-LQFS-4818 [mm]
  rrect50% 2x3.6 smd paste-1: 1(-1.7,0) 2(1.7,0)
  silkscreen extent -2.5,-2.5 2.5,2.5, body extent -2.4,-2.4 2.4,2.4, height 1.81
XP-Power_BCT40T24S12 [mm]
  rrect50% 1.8x1.8 hole 1.2: 1(-10.16,-2.54)
  round 1.8 hole 1.2: 2(-10.16,2.54) 3(-10.16,10.16) 4(10.16,10.16) 5(10.16,0) 6(10.16,-10.16)
  silkscreen extent -12.95,-12.95 12.95,12.95, body extent -12.7,-12.7 12.7,12.7, height 10.01
XP-Power_PBT01F [mm]
  rect 0.7x1.6 smd paste-2539.97: 1(-3.81,-5.2)
  rrect50% 0.7x1.6 smd: 2(-1.27,-5.2) 4(3.81,-5.2) 5(3.81,5.2) 8(-3.81,5.2)
  silkscreen extent -6.4,-5.35 6.4,5.35, body extent -6.38,-5.55 6.38,5.55, height 7.01

## Part data
A100: library part Molex_0451350403, "Cable Assembly - 4pos. MiniFit - 30cm - 2 rows - 4.20mm pitch - latch lock", company part number=-, jacket colour=Black, Manufacturer 1=Molex, Supplier Part Number 1=WM16574-ND, Voltage=300V, Assembly House Supplier="Assembly House", cable length="300 mm", Category=Cable_Assemblies, Category_sub=Rectangular_Cable_Assemblies, Check#1 Symbol=PCLE_2026-03-30, Check#2 Attributes=PCLE_2026-03-30, Check#3 Footprint=PCLE_2026-03-30, Check#4 PCB Assembly=-, Check#5 Functional=-, ComponentLifeCycle=New, ComponentLink1Description=Datasheet, ComponentLink1URL=https://www.literature.molex.com/SQLImages/kelmscott/Molex/PDF_Images/987651-5853.PDF, connector end a=Socket, connector end a pin count="4 Position", connector end b=Socket, connector end b pin count="4 Position", Date - Creation="2026-03-25 12:35", date - modification="2026-03-25 12:35", db_component_name=Molex_0451350403, Gender="Female / Female", ID=2, imax="8 A", jacket material="Polyvinyl Chloride (PVC)", Manufacturer Part Number 1=0451350403, Mounting=-, Package=-, pitch=4.20mm, Replacement Part Number=-, RoHS=Yes, series=45135, Size / Dimension=-, Supplier 1=Digi-Key, Supplier 2=Digi-Key, Supplier 3=Digi-Key, Supplier 4=Mouser, Supplier Part Number 2=WM16574-ND, Supplier Part Number 3=WM16574-ND, Supplier Part Number 4=538-45135-0403, wire gauge - awg="16 AWG"
A101: library part Molex_0451350401, "Cable Assembly - 4pos. MiniFit - 15cm - 2 rows - 4.20mm pitch - latch lock", company part number=-, jacket colour=Black, Manufacturer 1=Molex, Supplier Part Number 1=WM16573-ND, Voltage=300V, Assembly House Supplier="Assembly House", cable length="150 mm", Category=Cable_Assemblies, Category_sub=Rectangular_Cable_Assemblies, Check#1 Symbol=PCLE_2026-03-30, Check#2 Attributes=PCLE_2026-03-30, Check#3 Footprint=PCLE_2026-03-30, Check#4 PCB Assembly=-, Check#5 Functional=-, ComponentLifeCycle=New, ComponentLink1Description=Datasheet, ComponentLink1URL=https://www.literature.molex.com/SQLImages/kelmscott/Molex/PDF_Images/987651-5853.PDF, connector end a=Socket, connector end a pin count="4 Position", connector end b=Socket, connector end b pin count="4 Position", Date - Creation="2026-03-25 12:35", date - modification="2026-03-25 12:35", db_component_name=Molex_0451350401, Gender="Female / Female", ID=3, imax="8 A", jacket material="Polyvinyl Chloride (PVC)", Manufacturer Part Number 1=0451350401, Mounting=-, Package=-, pitch=4.20mm, Replacement Part Number=-, RoHS=Yes, series=45135, Size / Dimension=-, Supplier 1=Digi-Key, Supplier 2=Digi-Key, Supplier 3=Digi-Key, Supplier 4=Mouser, Supplier Part Number 2=WM16573-ND, Supplier Part Number 3=WM16573-ND, Supplier Part Number 4=538-45135-0401, wire gauge - awg="16 AWG"
A102 A103: library part solder_joint, "Solder Joint - SMD", company part number=-, Manufacturer 1=noBOM, temperature=-40..+85°C, Assembly House Supplier=Company, Category=Test_and_Measurement, Category_sub=Test_Points, Check#1 Symbol=PCLE_2026-03-23, Check#2 Attributes=PCLE_2026-03-23, Check#3 Footprint=PCLE_2026-03-23, Check#4 PCB Assembly=PCLE_2026-03-23, Check#5 Functional=PCLE_2026-03-23, component_type="Test Point", ComponentLifeCycle=Active, Date - Creation="2026-03-23 16:15", date - modification="2026-03-23 16:15", db_component_name=solder_joint, Height=-, ID=6, Manufacturer Part Number 1=noBOM, Mounting=SMD, Part Status=Active, Replacement Part Number=-, RoHS=Yes, Size / Dimension=-, Supplier 1=-, Supplier 2=-, Supplier 3=-, Supplier 4=-, Supplier Part Number 1=-, Supplier Part Number 2=-, Supplier Part Number 3=-, Supplier Part Number 4=-, Type="Test Point"
C200 C207: library part KEMET_C1808C222KZRACTU, "Capacitor - SMD - 2n20 - ±10% - 2.50kV - X7R - Ceramic - EIA-1808", Case Code - in=1808, Case Code - mm=4520, Dielectric=X7R, Manufacturer 1=KEMET, Manufacturer Part Number 1=C1808C222KZRACTU, Package="EIA-1808 (4.60 x 2.00mm)", Supplier Part Number 1=399-C1808C222KZRACTUCT-ND, temperature=-55..+125°C, Temperature Coefficient=MLCC, Tolerance=±10%, Value Sort=0.000000002200000000000000, Voltage=2.50kV, Assembly House Supplier="Assembly House", Category=Capacitor, Category_sub=MLCC, Check#1 Symbol="___ OK ___", Check#2 Attributes=PCLE_2026-03-31, Check#3 Footprint="___ OK ___", Check#4 PCB Assembly="___ OK ___", Check#5 Functional="___ OK ___", component_type=Ceramic, ComponentLifeCycle=New, ComponentLink1Description=Datasheet, ComponentLink1URL=https://www.mouser.com/datasheet/3/508/1/KEM_C1010_X7R_HV_SMD.pdf, Date - Creation="2026-03-31 11:04", date - modification="2026-03-31 11:04", db_component_name=KEMET_C1808C222KZRACTU, ID=4, Mounting=SMD, RoHS=Yes, Size / Dimension="4.60 x 2.00mm", Supplier 1=Digi-Key, Supplier 2=Digi-Key, Supplier 3=Digi-Key, Supplier 4=Mouser, Supplier Part Number 2=399-C1808C222KZRACTUDKR-ND, Supplier Part Number 3=399-C1808C222KZRACTUTR-ND, Supplier Part Number 4=80-C1808C222KZR, Termination=Standard
C201 C202 C203 C204 C208 C209 C210 C211 C223 C224 C225 C226 C227 C239 C244: library part KEMET_C0805C106K3PACTU, "Capacitor - SMD - 10u - ±10% - 25V - Ceramic - X5R - EIA-0805", Case Code - in=0805, Case Code - mm=2012, company part number=-, Dielectric=Ceramic, Manufacturer 1=KEMET, Manufacturer Part Number 1=C0805C106K3PACTU, Package="EIA-0805 (2.00 x 1.25 x 1.45mm)", Supplier Part Number 1=399-11939-1-ND, temperature=-55..+85°C, Temperature Coefficient=X5R, Tolerance=±10%, Value Sort=0.000010000000000000000, Voltage=25V, Assembly House Supplier="Assembly House", Category=Capacitor, category#0="Ceramic Capacitors", Category_sub=Ceramic, Check#1 Symbol="___ OK ___", Check#2 Attributes=PCLE_2024-09-24, Check#3 Footprint="___ OK ___", Check#4 PCB Assembly="___ OK ___", Check#5 Functional="___ OK ___", component_type=Ceramic, ComponentLifeCycle=New, ComponentLink1Description=Datasheet, ComponentLink1URL=https://www.mouser.com/datasheet/2/447/KEM_C1006_X5R_SMD-3316465.pdf, ComponentLink2Description=KEM_C1006_X5R_SMD.pdf, ComponentLink2URL=https://content.kemet.com/datasheets/KEM_C1006_X5R_SMD.pdf, Date - Creation="2024-09-23 17:30", date - modification="2024-09-23 17:30", db_component_name=KEMET_C0805C106K3PACTU, Family=Ceramic, Frequency / Impedance=-, Height=1.45mm, ID=56, Mounting=SMD, Part Status=Active, pricing - digi-key="1=0.27000 / 10=0.17500 / 50=0.11040 / 100=0.08840 / 500=0.06382 / 1000=0.05645 / 2500=0.05400 USD", pricing - mouser="1=0.249 / 10=0.11 / 100=0.064 / 1000=0.057 / 2500=0.05 / 10000=0.045 / 25000=0.044 / 100000=0.039 USD", Replacement Part Number=-, RoHS=Yes, Size / Dimension="2.00 x 1.25 x 1.45mm", Supplier 1=Digi-Key, Supplier 2=Digi-Key, Supplier 3=Digi-Key, Supplier 4=Mouser, Supplier Part Number 2=399-11939-6-ND, Supplier Part Number 3=399-11939-2-ND, Supplier Part Number 4=80-C0805C106K3P, Termination=Standard
C205 C206 C241 C242 C243: library part Taiyo-Yuden_TMK325ABJ476MM-P, "Capacitor - SMD - 47u - ±20% - 25V - Ceramic - X5R - EIA-1210", Case Code - in=1210, Case Code - mm=3225, company part number=-, Dielectric=Ceramic, Manufacturer 1="Taiyo Yuden", Manufacturer Part Number 1=TMK325ABJ476MM-P, Package="EIA-1210 (3.20 x 2.50 x 2.80mm)", Supplier Part Number 1=587-5479-1-ND, temperature=-55..+85°C, Temperature Coefficient=X5R, Tolerance=±20%, Value Sort=0.000047000000000000000, Voltage=25V, Application="SMPS Filtering", Assembly House Supplier="Assembly House", Category=Capacitor, category#0="Ceramic Capacitors", Category_sub=Ceramic, Check#1 Symbol="___ OK ___", Check#2 Attributes=PCLE_2025-04-03, Check#3 Footprint="___ OK ___", Check#4 PCB Assembly="___ OK ___", Check#5 Functional="___ OK ___", Class="Class 2", component_type=Ceramic, ComponentLifeCycle=New, ComponentLink1Description=Datasheet, ComponentLink1URL=https://www.mouser.com/datasheet/2/396/mlcc02_e-1307760.pdf, ComponentLink2Description="MLCC Capacitor Catalog", ComponentLink2URL=https://www.yuden.co.jp/productdata/catalog/mlcc06_e.pdf, ComponentLink3Description="TMK325ABJ476MM-P Spec Sheet", ComponentLink3URL=https://media.digikey.com/pdf/Data%20Sheets/Taiyo%20Yuden%20PDFs%20URL%20links/TMK325ABJ476MM-P_SS.pdf, ComponentLink4Description="Mult Devs Part Number 23/Sep/2022", ComponentLink4URL=https://media.digikey.com/pdf/PCNs/Taiyo%20Yuden/UTY-PCN22-01D.pdf, ComponentLink5Description="Mult Devs NRND 01/Apr/2023", ComponentLink5URL=https://media.digikey.com/pdf/PCNs/Taiyo%20Yuden/UTY-NRND23-01D.pdf, Date - Creation="2023-06-28 13:10", date - modification="2023-06-28 13:10", db_component_name=Taiyo-Yuden_TMK325ABJ476MM-P, Frequency / Impedance=-, Height=2.80mm, ID=29, Mounting=SMD, Part Status=Active, pricing - digi-key="1=1.18000 / 10=0.93500 / 50=0.81020 / 100=0.70110 / 500=0.52970 / 1000=0.46738 USD", pricing - mouser="1=1.20 / 10=0.823 / 100=0.712 / 500=0.538 / 1000=0.474 / 2000=0.443 / 5000=0.416 / 10000=0.407 USD", Replacement Part Number=-, RoHS=Yes, Size / Dimension="3.20 x 2.50 x 2.80mm", Supplier 1=Digi-Key, Supplier 2=Digi-Key, Supplier 3=Digi-Key, Supplier 4=Mouser, Supplier Part Number 2=587-5479-6-ND, Supplier Part Number 3=587-5479-2-ND, Supplier Part Number 4=963-TMK325ABJ476MM-P, Termination=Standard, Vac=-
C212 C228 C245: library part Samsung_CL10A475KP8NNNC, "Capacitor - SMD - 4u70 - ±10% - 10V - Ceramic - X5R - EIA-0603", Case Code - in=0603, Case Code - mm=1608, company part number=-, Dielectric=Ceramic, Manufacturer 1=Samsung, Manufacturer Part Number 1=CL10A475KP8NNNC, Package="EIA-0603 (1.60 x 0.80 x 0.90mm)", Supplier Part Number 1=1276-1044-1-ND, temperature=-55..+85°C, Temperature Coefficient=X5R, Tolerance=±10%, Value Sort=0.0000047, Voltage=10V, Application="General Purpose", Assembly House Supplier="Assembly House", Category=Capacitor, Category_sub=Ceramic, Check#1 Symbol=PCLE_2021-06-25, Check#2 Attributes=PCLE_2021-06-25, Check#3 Footprint=PCLE_2021-06-25, Check#4 PCB Assembly="___ OK ___", Check#5 Functional="___ OK ___", Class="Class 2", component_type=Ceramic, ComponentLifeCycle=New, ComponentLink1Description=Datasheet, ComponentLink1URL=https://www.mouser.com/datasheet/2/585/MLCC-1837944.pdf, ComponentLink2Description="Multitlayer Ceramic Cap Catalog", ComponentLink2URL=https://www.samsungsem.com/resources/file/global/support/product_catalog/MLCC.pdf, Date - Creation="2021-03-25 13:20", date - modification="2021-08-18 14:08", db_component_name=Samsung_CL10A475KP8NNNC, Frequency / Impedance=-, Height=0.90mm, ID=3, Mounting=SMD, Part Status=Active, pricing - digi-key="1=0.09000 / 10=0.04500 / 50=0.02460 / 100=0.02000 / 500=0.01428 / 1000=0.01122 / 4000=0.00941 USD", pricing - mouser="1=0.101 / 10=0.027 / 100=0.023 / 500=0.017 / 1000=0.013 / 2000=0.012 / 4000=0.01 USD", product="General Type MLCCs", product#0="Ceramic Capacitors", Replacement Part Number=-, RoHS=Yes, series=CL, Size / Dimension="1.60 x 0.80 x 0.90mm", Supplier 1=Digi-Key, Supplier 2=Digi-Key, Supplier 3=Digi-Key, Supplier 4=Mouser, Supplier Part Number 2=1276-1044-6-ND, Supplier Part Number 3=1276-1044-2-ND, Supplier Part Number 4=187-CL10A475KP8NNNC, Termination=Standard, Type="Multilayer Ceramic Capacitor", Vac=-
C213 C214 C215 C216 C229 C230 C231 C232 C246: library part KEMET_C0603C105K8PACTU, "Capacitor - SMD - 1u - 10% - 10V - X5R - Ceramic - EIA-0603", Case Code - in=0603, Case Code - mm=1608, company part number=-, Dielectric=X5R, Manufacturer 1=KEMET, Manufacturer Part Number 1=C0603C105K8PACTU, Package="EIA-0603 (1.60 x 0.80mm)", Supplier Part Number 1=80-C0603C105K8P, temperature=-55..+85°C, Temperature Coefficient=MLCC, Tolerance=10%, Value Sort=0.000001, Voltage=10V, Assembly House Supplier="Assembly House", Category=Capacitor, Category_sub=MLCC, Check#1 Symbol=PCLE_2022-10-04, Check#2 Attributes=PCLE_2022-10-04, Check#3 Footprint=PCLE_2022-10-04, Check#4 PCB Assembly="___ OK ___", Check#5 Functional="___ OK ___", Class="Class 2", component_type=Ceramic, ComponentLifeCycle=New, ComponentLink1Description=Datasheet, ComponentLink1URL=https://www.mouser.com/datasheet/2/212/KEM_C1006_X5R_SMD-1103249.pdf, Date - Creation="2022-02-14 13:36", date - modification="2022-02-14 13:36", db_component_name=KEMET_C0603C105K8PACTU, ID=55, Mounting=SMD, pricing - mouser="1=0.101 / 10=0.029 / 100=0.023 / 500=0.017 / 1000=0.014 / 4000=0.012 / 8000=0.01 USD", product="General Type MLCCs", product#0="Ceramic Capacitors", RoHS=Yes, series="SMD Comm X5R", Size / Dimension="1.6 x 0.8mm", Supplier 1=Mouser, Termination=Standard, Type="X5R Dielectric Commercial Grade MLCCs", Vdc=10V
C217 C218 C233 C234 C247: library part Samsung_CL10B474KP8NNNC, "Capacitor - SMD - 470n - ±10% - 10V - Ceramic - X7R - EIA-0603", Case Code - in=0603, Case Code - mm=1608, company part number=-, Dielectric=Ceramic, Manufacturer 1=Samsung, Manufacturer Part Number 1=CL10B474KP8NNNC, Package="EIA-0603 (1.60 x 0.80 x 0.90mm)", Supplier Part Number 1=1276-1247-1-ND, temperature=-55..+125°C, Temperature Coefficient=X7R, Tolerance=±10%, Value Sort=0.000000470000000000000, Voltage=10V, Application="General Purpose", Assembly House Supplier="Assembly House", Category=Capacitor, category#0="Ceramic Capacitors", Category_sub=Ceramic, Check#1 Symbol="___ OK ___", Check#2 Attributes=PCLE_2025-04-03, Check#3 Footprint="___ OK ___", Check#4 PCB Assembly="___ OK ___", Check#5 Functional="___ OK ___", Class="Class 2", component_type=Ceramic, ComponentLifeCycle=New, ComponentLink1Description=Datasheet, ComponentLink1URL=https://www.mouser.com/datasheet/2/585/MLCC-1837944.pdf, ComponentLink2Description="Multitlayer Ceramic Cap Catalog", ComponentLink2URL=https://www.samsungsem.com/resources/file/global/support/product_catalog/MLCC.pdf, ComponentLink3Description="CL Series, MLCC Datasheet", ComponentLink3URL=https://media.digikey.com/pdf/Data%20Sheets/Samsung%20PDFs/CL_Series_MLCC_ds.pdf, ComponentLink4Description="CL10B474KP8NNNC Spec", ComponentLink4URL=https://media.digikey.com/pdf/Data%20Sheets/Samsung%20PDFs/CL10B474KP8NNNC_Spec.pdf, Date - Creation="2023-06-28 13:04", date - modification="2023-06-28 13:04", db_component_name=Samsung_CL10B474KP8NNNC, Frequency / Impedance=-, Height=0.90mm, ID=71, Mounting=SMD, Part Status=Active, pricing - digi-key="1=0.10000 / 10=0.06500 / 50=0.03560 / 100=0.02910 / 500=0.02078 / 1000=0.01633 / 4000=0.01366 USD", pricing - mouser="1=0.102 / 10=0.066 / 100=0.03 / 1000=0.017 / 4000=0.015 / 8000=0.012 / 24000=0.011 / 48000=0.01 / 100000=0.009 USD", Replacement Part Number=-, RoHS=Yes, series=CL, Size / Dimension="1.60 x 0.80 x 0.90mm", Supplier 1=Digi-Key, Supplier 2=Digi-Key, Supplier 3=Digi-Key, Supplier 4=Mouser, Supplier Part Number 2=1276-1247-6-ND, Supplier Part Number 3=1276-1247-2-ND, Supplier Part Number 4=187-CL10B474KP8NNNC, Termination=Standard
C219 C220 C221 C222 C235 C236 C237 C238 C248 C249 C251: library part AVX_Corporation_LD03ZC104KAB2A, "Capacitor - SMD - 100n - ±10% - 10V - Ceramic - X7R - EIA-0603", Case Code - in=0603, Case Code - mm=1608, company part number=-, Dielectric=Ceramic, Manufacturer 1=AVX_Corporation, Manufacturer Part Number 1=LD03ZC104KAB2A, Package="EIA-0603 (1.60 x 0.80 x 0.90mm)", Supplier Part Number 1=478-12926-1-ND, temperature=-55..+125°C, Temperature Coefficient=X7R, Tolerance=±10%, Value Sort=0.0000001, Voltage=10V, Application="General Purpose", Assembly House Supplier="Assembly House", Category=Capacitor, Category_sub=Ceramic, Check#1 Symbol=PCLE_2021-06-25, Check#2 Attributes=PCLE_2021-06-25, Check#3 Footprint=PCLE_2021-06-25, Check#4 PCB Assembly="___ OK ___", Check#5 Functional="___ OK ___", ComponentLifeCycle=New, ComponentLink1Description=Datasheet, ComponentLink1URL=https://www.mouser.com/datasheet/2/40/LD_Series-777051.pdf, ComponentLink2Description="SXA-3318B, SXA-3318BZ", ComponentLink2URL=https://media.digikey.com/pdf/Data%20Sheets/RFMD%20PDFs/SXA-3318B(Z).pdf, ComponentLink3Description="LD Series, MLCC Tin/Lead Term B", ComponentLink3URL=https://datasheets.avx.com/LD-Series.pdf, ComponentLink4Description="Ceramic Chip Capacitor Catalog", ComponentLink4URL=https://catalogs.avx.com/SurfaceMount.pdf, Date - Creation="2021-03-25 12:23", date - modification="2021-04-06 17:55", db_component_name=AVX_Corporation_LD03ZC104KAB2A, Frequency / Impedance=-, Height=0.90mm, ID=60, Mounting=SMD, Part Status=Active, pricing - digi-key="1=0.66000 / 10=0.46500 / 50=0.35140 / 100=0.30610 / 500=0.22674 / 1000=0.19272 / 4000=0.17005 USD", pricing - mouser="1=0.787 / 10=0.555 / 100=0.365 / 500=0.27 / 1000=0.227 / 4000=0.175 / 8000=0.17 / 12000=0.161 / 24000=0.151 USD", product="General Type MLCCs", product#0="Ceramic Capacitors", Replacement Part Number=-, RoHS="RoHS non-compliant", series=LD, Size / Dimension="1.60 x 0.81 x 0.90mm", Supplier 1=Digi-Key, Supplier 2=Digi-Key, Supplier 3=Digi-Key, Supplier 4=Mouser, Supplier Part Number 2=478-12926-6-ND, Supplier Part Number 3=478-12926-2-ND, Supplier Part Number 4=581-LD03ZC104KAB2A, Termination=Standard, Type="MLCC Tin/Lead Termination"
C240 C250: library part TDK_C4520X7R3D102K130KA, "Capacitor - SMD - 1n - ±10% - 2kV - Ceramic - X7R - EIA-1808", Case Code - in=1808, Case Code - mm=4520, company part number=-, Dielectric=Ceramic, Manufacturer 1=TDK, Manufacturer Part Number 1=C4520X7R3D102K130KA, Package="EIA-1808 (4.60 x 2.00 x 1.50mm)", Supplier Part Number 1=445-2386-1-ND, temperature=-55..+125°C, Temperature Coefficient=X7R, Tolerance=±10%, Value Sort=0.000000001000000000000, Voltage=2kV, Assembly House Supplier="Assembly House", Category=Capacitor, category#0="Ceramic Capacitors", Category_sub=Ceramic, Check#1 Symbol="___ OK ___", Check#2 Attributes=PCLE_2024-10-10, Check#3 Footprint="___ OK ___", Check#4 PCB Assembly="___ OK ___", Check#5 Functional="___ OK ___", component_type=Ceramic, ComponentLifeCycle=New, ComponentLink1Description="C Series, High Voltage", ComponentLink1URL=https://product.tdk.com/en/system/files?file=dam/doc/product/capacitor/ceramic/mlcc/catalog/mlcc_commercial_highvoltage_en.pdf, ComponentLink2Description="C Series, High Voltage Spec", ComponentLink2URL=https://product.tdk.com/en/system/files?file=dam/doc/product/capacitor/ceramic/mlcc/specification/mlccspec_commercial_highvoltage_en.pdf, ComponentLink4Description="C4520X7R3D102K130KA Character Sheet", ComponentLink4URL=https://product.tdk.com/en/system/files?file=dam/doc/product/capacitor/ceramic/mlcc/charasheet/c4520x7r3d102k130ka.pdf, ComponentLink5Description="MLCC Part Number Change 30/Nov/2012", ComponentLink5URL=https://mm.digikey.com/Volume0/opasdata/d220001/medias/docus/4844/PCN_445_Part_Number_Change.pdf, Date - Creation="2024-06-26 12:56", date - modification="2024-06-26 12:56", db_component_name=TDK_C4520X7R3D102K130KA, Family=Ceramic, Frequency / Impedance=-, Height=1.50mm, ID=3, Mounting=SMD, Part Status=Active, pricing - digi-key="1=0.65000 / 10=0.43300 / 50=0.34480 / 100=0.28480 / 500=0.22248 / 1000=0.18911 USD", pricing - mouser="1=0.627 / 10=0.343 / 100=0.221 / 1000=0.186 / 2000=0.165 / 10000=0.151 / 25000=0.147 / 50000=0.142 USD", Replacement Part Number=-, RoHS=Yes, Size / Dimension="4.50 x 2.00 x 1.50mm", Supplier 1=Digi-Key, Supplier 2=Digi-Key, Supplier 3=Digi-Key, Supplier 4=Mouser, Supplier Part Number 2=445-2386-6-ND, Supplier Part Number 3=445-2386-2-ND, Supplier Part Number 4=810-C4520X7R3D102K, Termination=Standard
C252 C253 C254 C255 C256 C257 C258 C259 C260 C261 C262 C264 C265 C266: library part TDK_C0510X7R1E473M030BA, "Capacitor - SMD - 47n - ±20% - 25V - Ceramic - X7R - EIA-0204", Case Code - in="0204 (Reversed)", Case Code - mm="0510 (Reversed)", company part number=-, Dielectric=Ceramic, Manufacturer 1=TDK, Manufacturer Part Number 1=C0510X7R1E473M030BA, Package="SMD EIA-0204 (0.52 x 1.00 x 0.50mm)", Supplier Part Number 1=445-C0510X7R1E473M030BACT-ND, temperature=-55..+125°C, Temperature Coefficient=X7R, Tolerance=±20%, Value Sort=0.000000047000000000000, Voltage=25V, Application="Bypass, Decoupling", Assembly House Supplier="Assembly House", Category=Capacitor, category#0="Ceramic Capacitors", Category_sub=Ceramic, Check#1 Symbol="___ OK ___", Check#2 Attributes=PCLE_2023-12-07, Check#3 Footprint="___ OK ___", Check#4 PCB Assembly="___ OK ___", Check#5 Functional="___ OK ___", Class=Class2, component_type=Ceramic, ComponentLifeCycle=New, ComponentLink2Description="C Series, Low ESL Reverse Geometry", ComponentLink2URL=https://product.tdk.com/en/system/files?file=dam/doc/product/capacitor/ceramic/mlcc/catalog/mlcc_commercial_lwreverse_en.pdf, ComponentLink3Description="C0510X7R1E473M030BA Char Sheet", ComponentLink3URL=https://product.tdk.com/en/system/files?file=dam/doc/product/capacitor/ceramic/mlcc/charasheet/c0510x7r1e473m030ba.pdf, ComponentLink4Description="MLCC Part Number Change 30/Nov/2012", ComponentLink4URL=https://mm.digikey.com/Volume0/opasdata/d220001/medias/docus/4844/PCN_445_Part_Number_Change.pdf, ComponentLink5Description=primary_datasheet, ComponentLink5URL=https://product.tdk.com/en/system/files?file=dam/doc/product/capacitor/ceramic/mlcc/catalog/mlcc_commercial_lwreverse_en.pdf, Date - Creation="2023-12-07 12:22", date - modification="2023-12-07 12:22", db_component_name=TDK_C0510X7R1E473M030BA, Family=Ceramic, footprint ref 2=C_0204_0510x0.35_2-term_M, footprint ref 3=C_0204_0510x0.35_2-term_L, Frequency / Impedance=-, Height=0.35mm, ID=4, Mounting=SMD, Part Status=Active, pricing - digi-key="1=0.27000 / 10=0.17600 / 50=0.12360 / 100=0.09980 / 500=0.07416 / 1000=0.06489 / 2500=0.06180 / 5000=0.05716 / 15000=0.05129 USD", pricing - mouser="1=0.259 / 10=0.123 / 100=0.075 / 1000=0.062 / 2500=0.058 / 10000=0.049 / 15000=0.047 / 45000=0.044 / 90000=0.039 USD", Replacement Part Number=-, RoHS=Yes, series=C, Size / Dimension="0.52 x 1.00 x 0.35mm", Supplier 1=Digi-Key, Supplier 2=Digi-Key, Supplier 3=Digi-Key, Supplier 4=Mouser, Supplier Part Number 2=445-C0510X7R1E473M030BADKR-ND, Supplier Part Number 3=445-C0510X7R1E473M030BATR-ND, Supplier Part Number 4=810-C0510X7R1E473M30, Termination=Standard, Vac=-
D100 D101 D102 D103 D104 D105 D106 D107 D108 D109 D110 D111 D112 D113 D114 D115 D116 D117 D118 D119 D120 D121 D122 D123 D124 D125 D126 D127 D128 D129 D130 D131: library part Texas-Instruments_TPD1E0B04DPYT, "Diode - TVS - 1 Channel - Bidirectional - 3.60V", Breakdown Voltage=6.70V, Capacitance @ Frequency="0.13pF at 1MHz", Cd - Diode Capacitance="0.18 pF", clamping voltage=19V, company part number=-, current - peak pulse (10/1000µs)="1.7A (8/20us)", ipp - peak pulse current="16 A", Manufacturer 1="Texas Instruments", Package="SMD EIA-0402 (1.00 x 0.60 x 0.45mm)", Package#0=X1SON-2, power - peak pulse=15W, Power Line Protection=No, Replacement Part Number=595-TPD1E0B04DPYR, Supplier Part Number 1=296-50033-1-ND, temperature=-40..+125°C, Vesd - Voltage ESD Air Gap=9kV, Vesd - Voltage ESD Contact=8kV, Voltage - Breakdown (Min)=6.70V(Typ), voltage - clamping (max) @ ipp=19V(Typ), Voltage - Reverse Standoff (Typ)=3.60V(Max), Working Voltage=3.60V, Application="General Purpose", Assembly House Supplier="Assembly House", bidirectional channels=1, Category=Circuit_Protection, Category_sub=Transient_Voltage_Suppressors_TVS_-_TVS_Diodes_-_TVS_Diodes, Check#1 Symbol=PCLE_2023-06-26, Check#2 Attributes=PCLE_2023-06-26, Check#3 Footprint=PCLE_2023-06-26, Check#4 PCB Assembly=PCLE_2023-12-06, Check#5 Functional=-, component_type="Diode - TVS", ComponentLifeCycle=New, ComponentLink1Description="Assembly Site 22/Dec/2022", ComponentLink1URL=https://media.digikey.com/pdf/PCNs/Texas%20Instruments/PCN20221219003.1.pdf, Date - Creation="2023-03-30 09:47", date - modification="2023-03-30 09:47", db_component_name=Texas-Instruments_TPD1E0B04DPYT, Height=0.45mm, ID=2, Manufacturer Part Number 1=TPD1E0B04DPYT, Mounting=SMD, nb channels="1 Channel", Part Status=Active, Polarity=Bidirectional, pppm - peak pulse power dissipation=15W, pricing - digi-key="1=0.95000 / 10=0.84700 / 100=0.66070 / 250=0.61760 USD", pricing - mouser="1=0.943 / 10=0.848 / 25=0.823 / 100=0.663 / 250=0.619 / 500=0.546 / 1000=0.431 / 2500=0.426 USD", product="ESD Suppressors", RoHS=Yes, series=TPD1E0B04, Size / Dimension="1.00 x 0.60 x 0.45mm", Supplier 1=Digi-Key, Supplier 2=Digi-Key, Supplier 3=Digi-Key, Supplier 4=Mouser, Supplier Part Number 2=296-50033-6-ND, Supplier Part Number 3=296-50033-2-ND, Supplier Part Number 4=595-TPD1E0B04DPYT, Type=Zener